# EAGLE board eib-128_panel (EAGLE 8.3.2), part 1 of 7
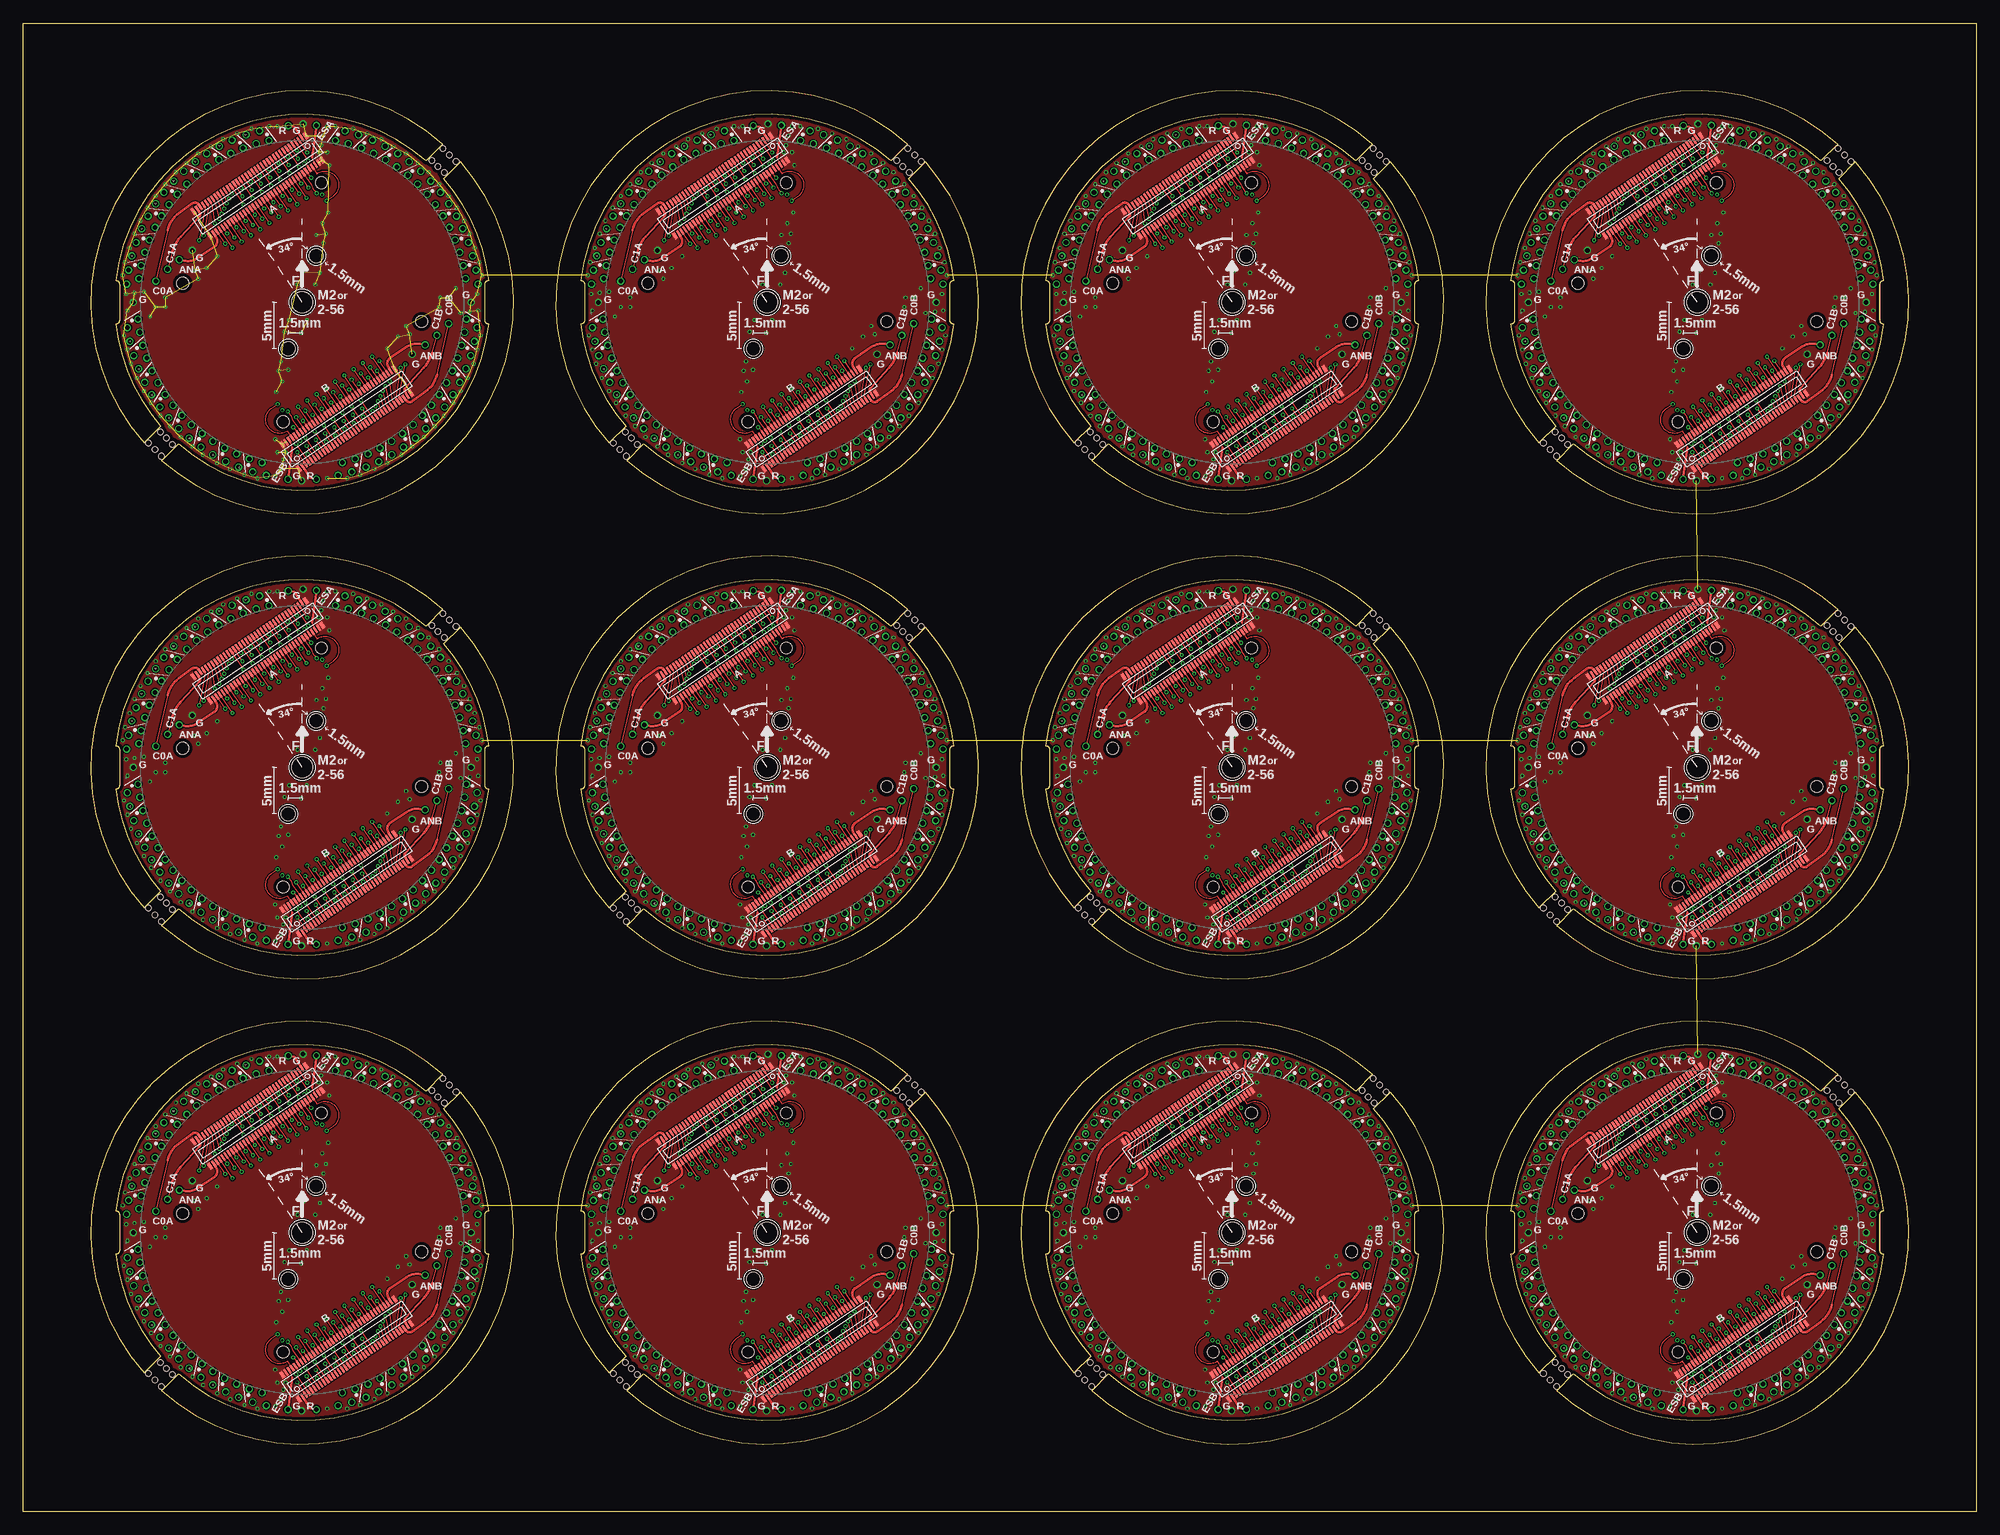
[diagram p0: board, top side]
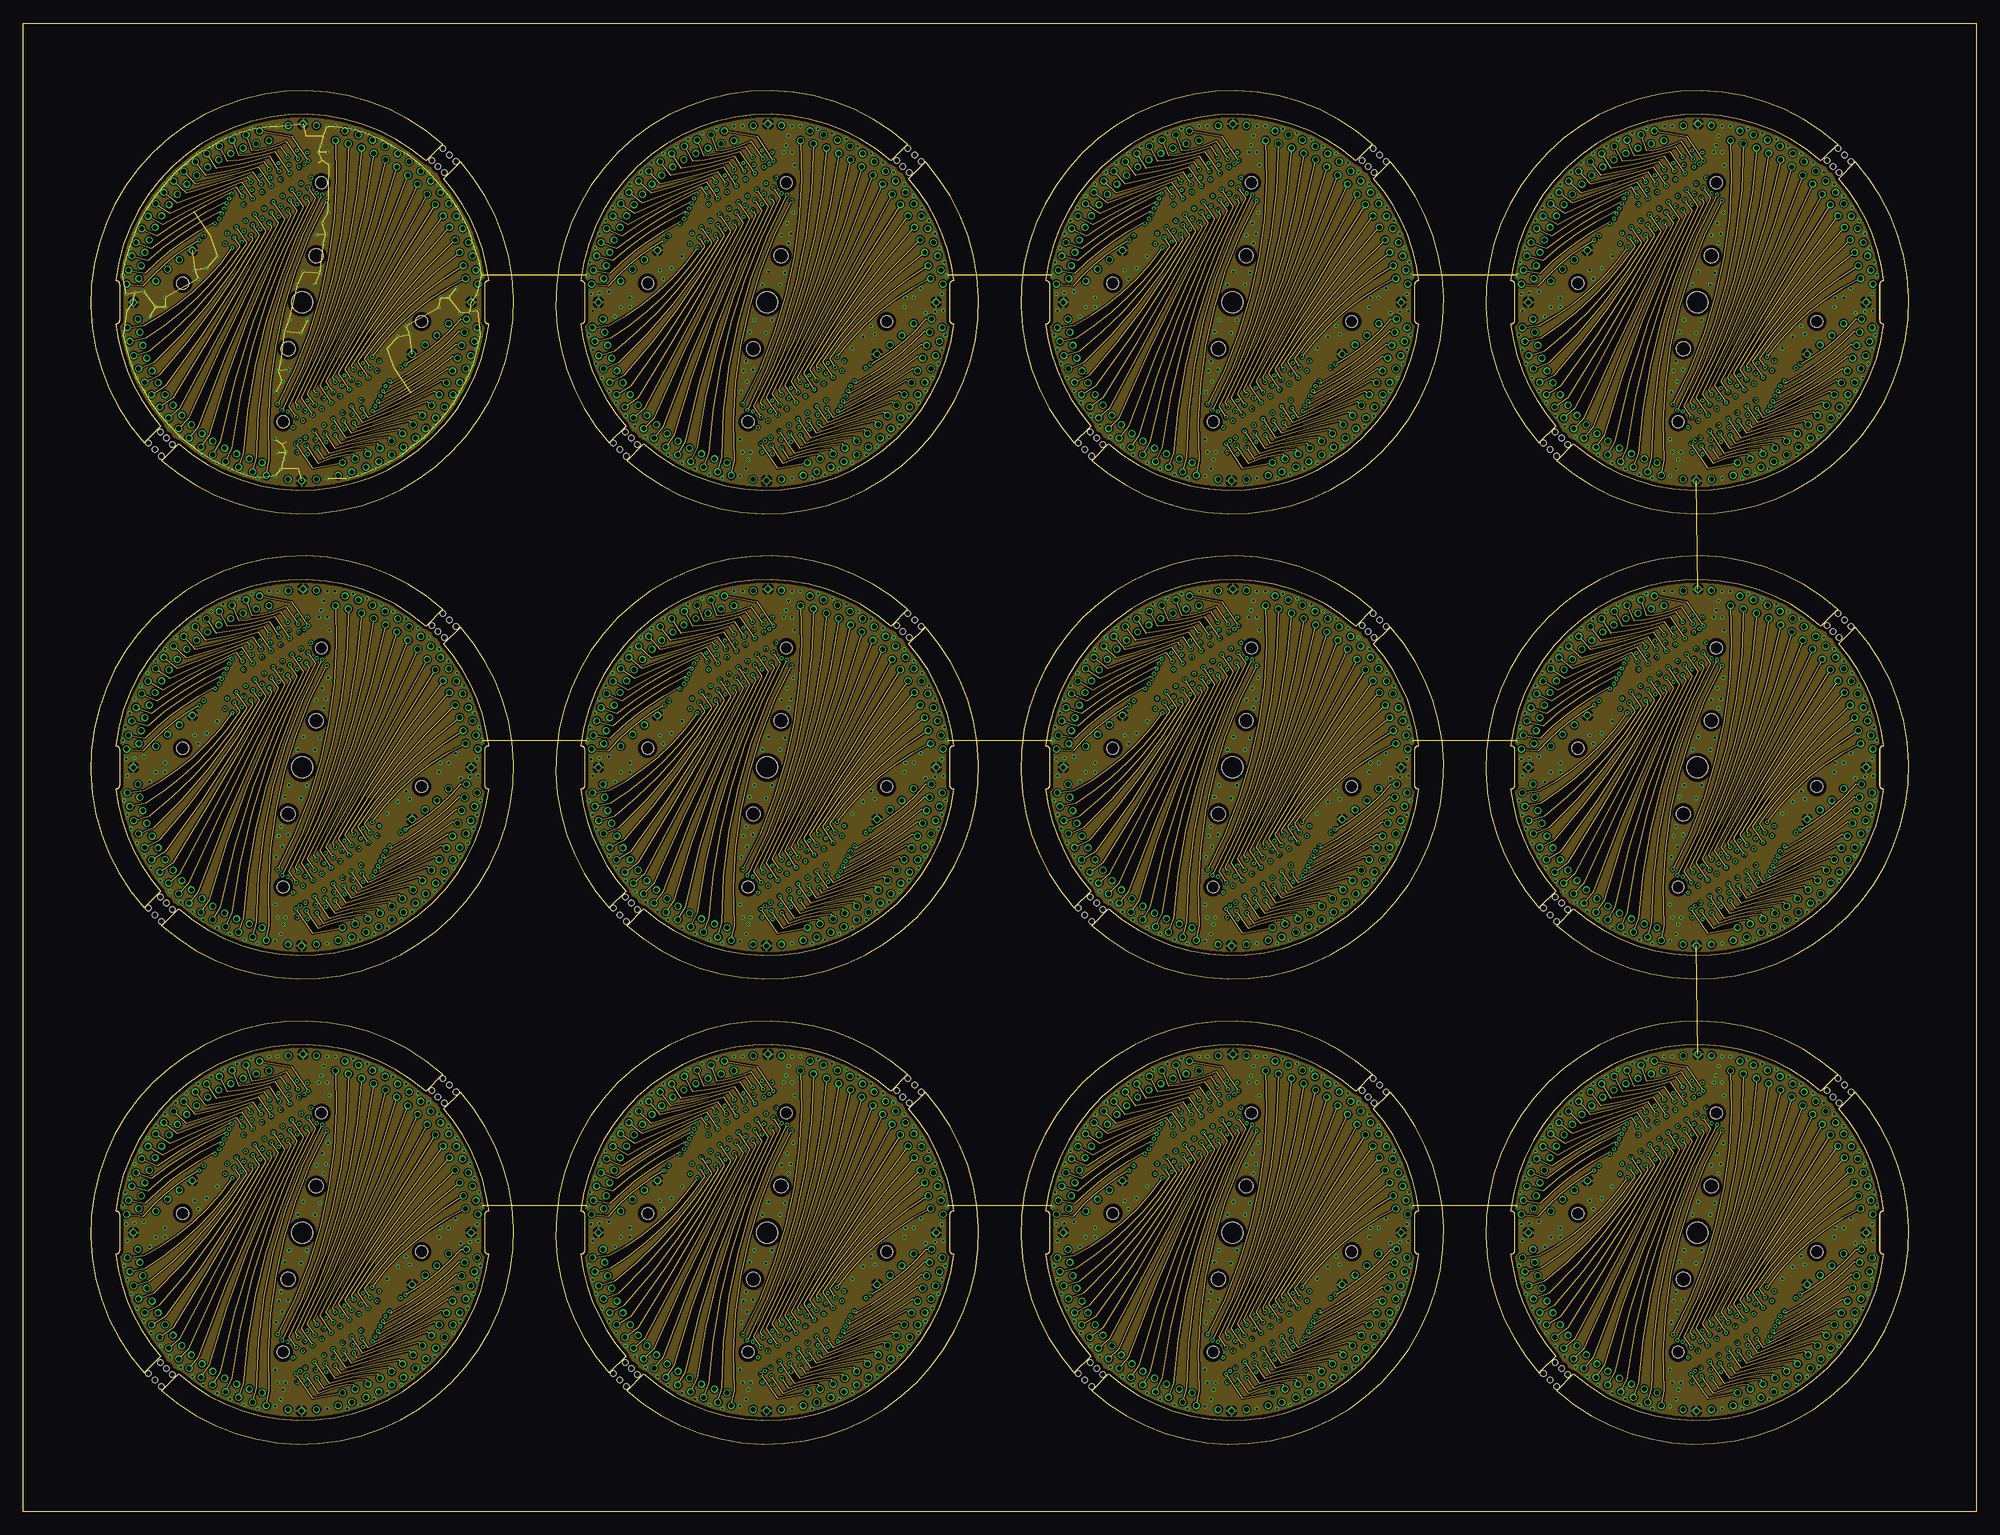
[diagram p1: board, inner layer Route2]
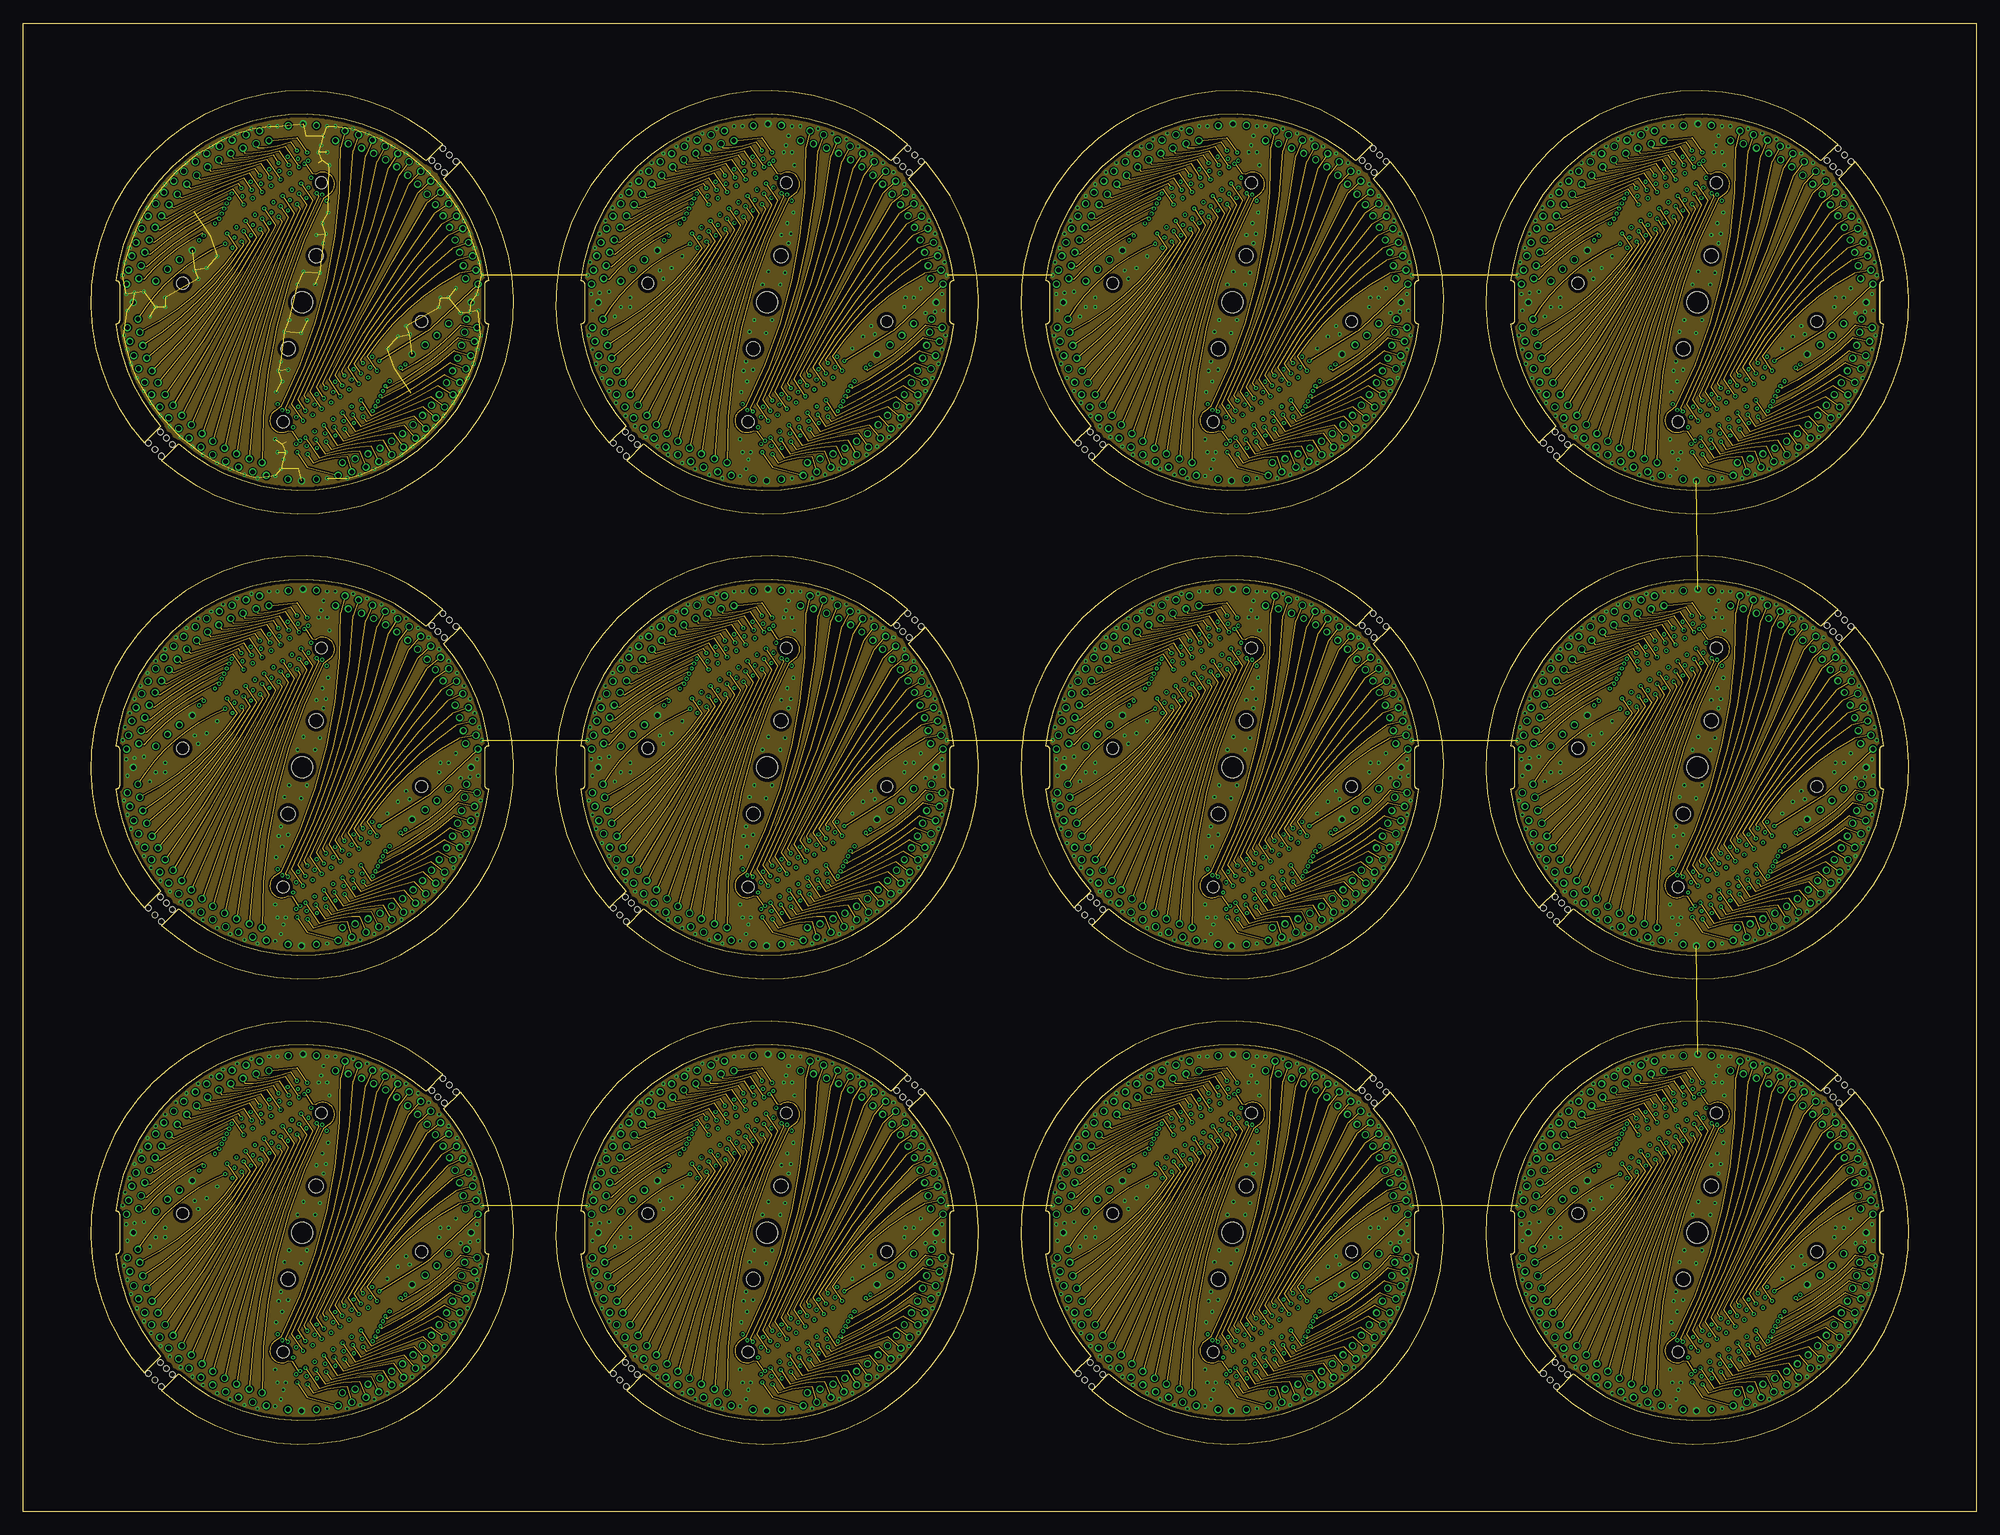
[diagram p2: board, inner layer Route15]
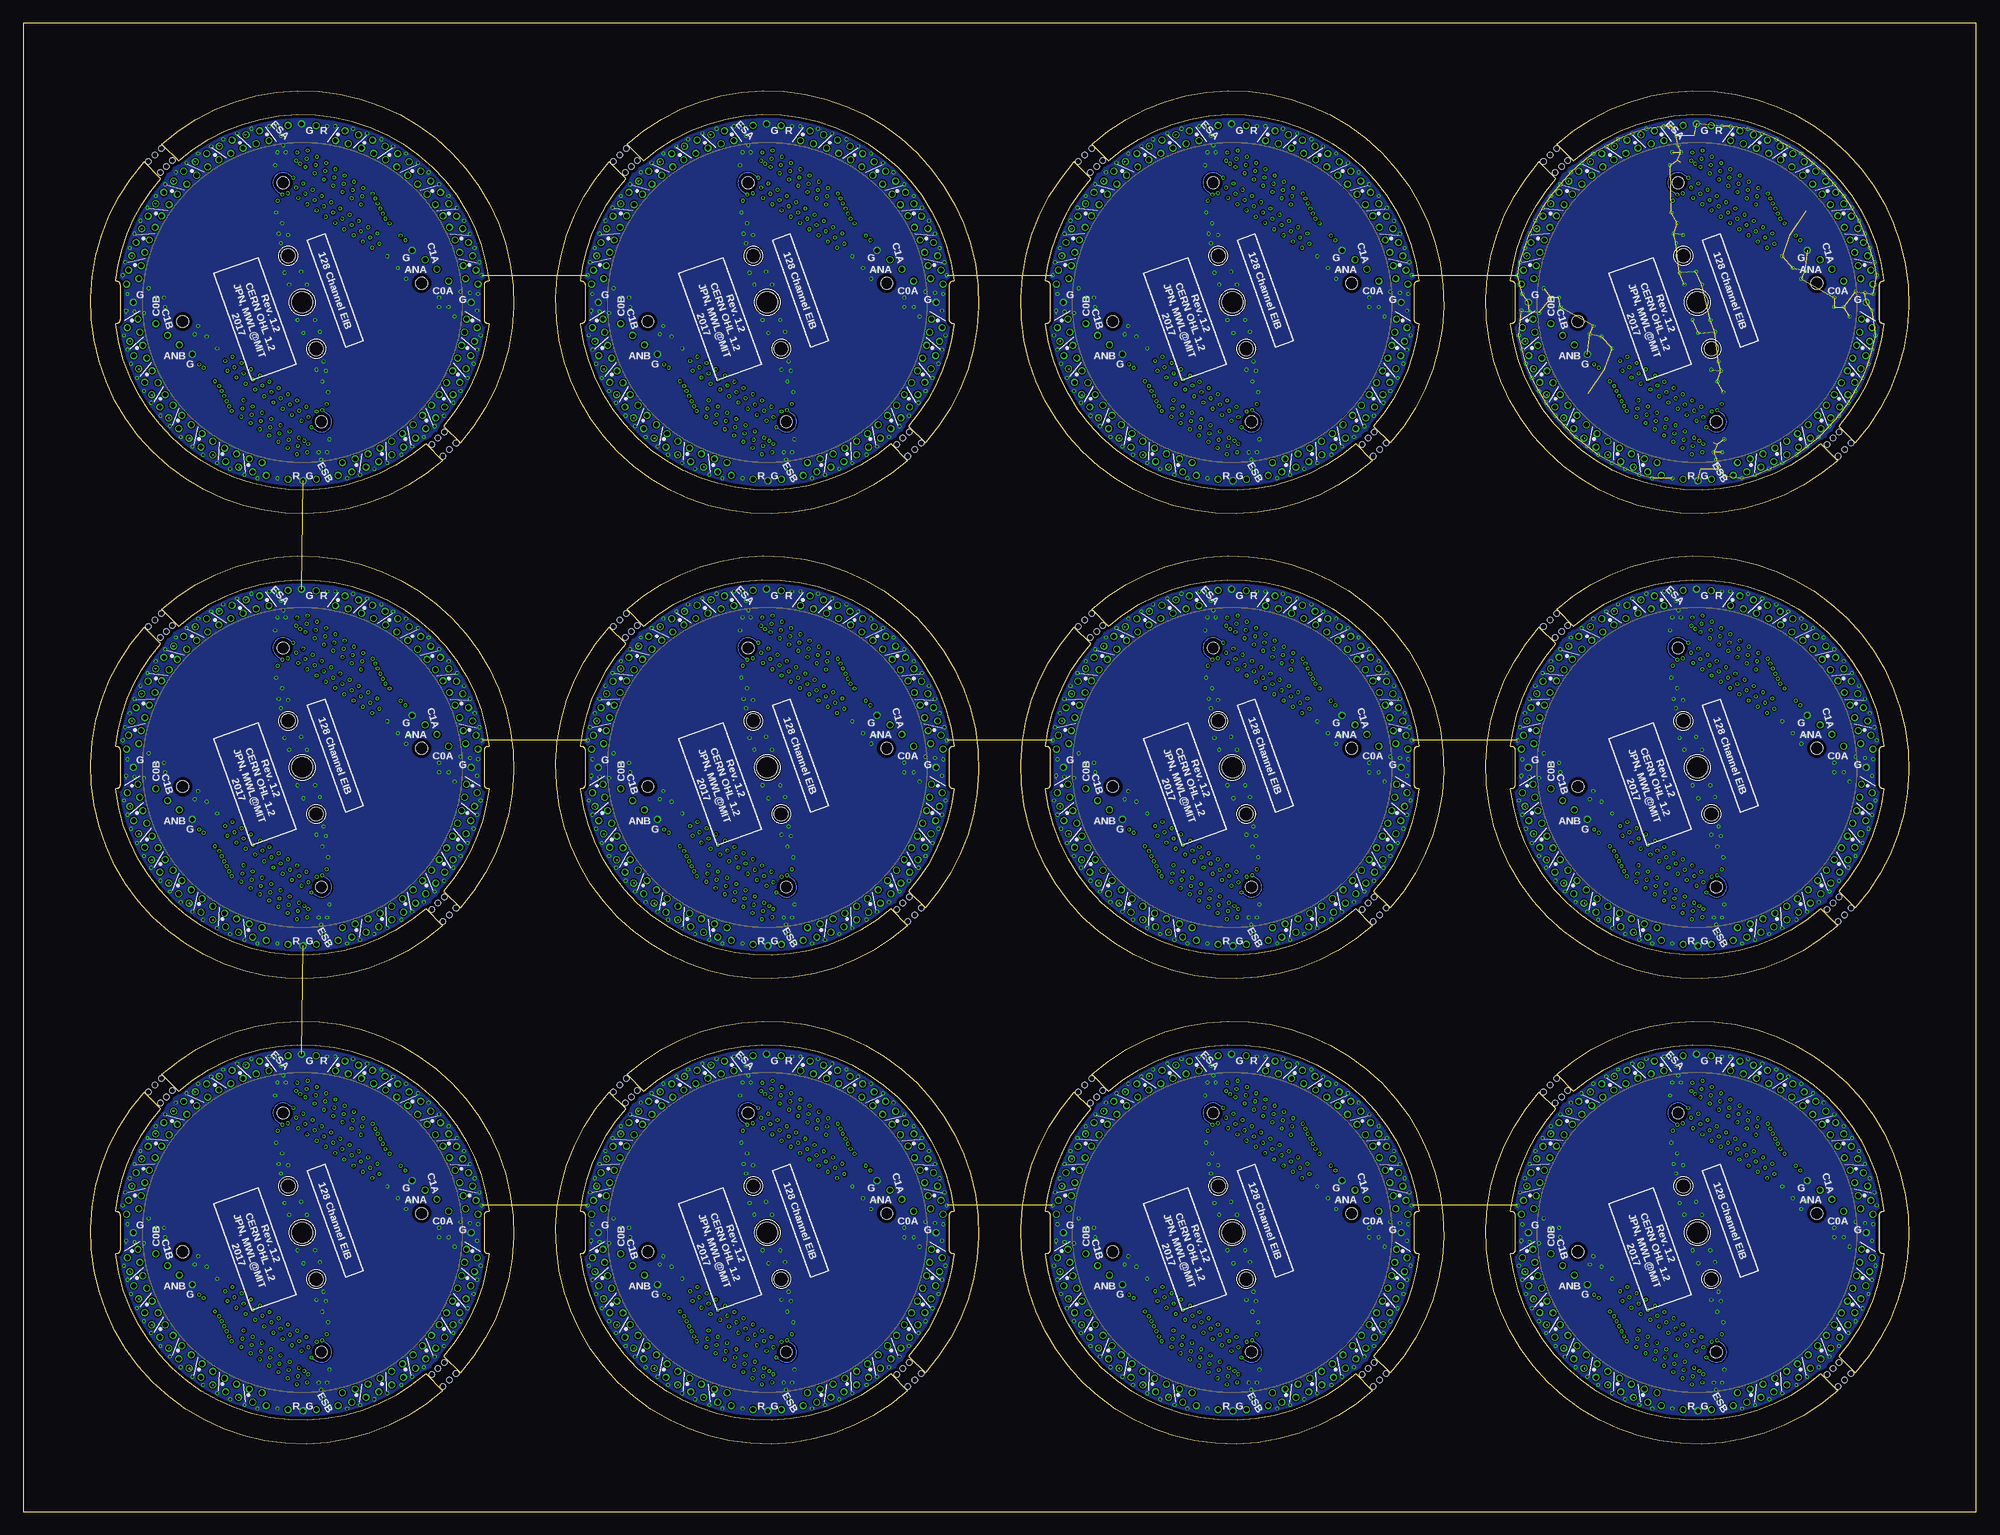
[diagram p3: board, bottom side, seen from below]

Size 210 x 160 mm. Coordinates in mm from the lower left corner, seen from the top.
Outline: 424 segments
Copper layers (1*2*15*16): Top 0.035559375mm / dielectric 0.17018125mm / Route2 0.01778125mm / dielectric 47mil / Route15 0.01778125mm / dielectric 0.17018125mm / Bottom 0.035559375mm
Design rules "sierra-circuits-advanced *": minimum track width 5mil, minimum drill 0.0078mm, track to track 5mil, track to pad 5mil, pad to pad 5mil, via to via 5mil, smd to smd 5mil, copper to edge 15mil, drill to drill 5mil, minimum pad ring 4mil, minimum via ring 4mil, stop-mask expansion 4mil, vias tented up to drill 100mil, thermal gap 10mil
Net classes: 1 thick: width 0.102 mm
Holes 1.27 mm at 32.06,42.85 42.85,27.94 27.94,17.15 17.15,32.06 82.06,42.85 92.85,27.94 77.94,17.15 67.15,32.06 132.06,42.85 142.85,27.94 127.94,17.15 117.15,32.06 182.06,42.85 192.85,27.94 177.94,17.15 167.15,32.06 32.06,92.85 42.85,77.94 27.94,67.15 17.15,82.06 82.06,92.85 92.85,77.94 77.94,67.15 67.15,82.06 132.06,92.85 142.85,77.94 127.94,67.15 117.15,82.06 182.06,92.85 192.85,77.94 177.94,67.15 167.15,82.06 32.06,142.85 42.85,127.94 27.94,117.15 17.15,132.06 82.06,142.85 92.85,127.94 77.94,117.15 67.15,132.06 132.06,142.85 142.85,127.94 127.94,117.15 117.15,132.06 182.06,142.85 192.85,127.94 177.94,117.15 167.15,132.06
Holes 0.6 mm at 45.13,46.55 45.84,45.84 46.55,45.13 43.95,45.26 44.59,44.59 45.26,43.95 14.87,13.45 14.16,14.16 13.45,14.87 16.05,14.74 15.41,15.41 14.74,16.05 95.13,46.55 95.84,45.84 96.55,45.13 93.95,45.26 94.59,44.59 95.26,43.95 64.87,13.45 64.16,14.16 63.45,14.87 66.05,14.74 65.41,15.41 64.74,16.05 145.13,46.55 145.84,45.84 146.55,45.13 143.95,45.26 144.59,44.59 145.26,43.95 114.87,13.45 114.16,14.16 113.45,14.87 116.05,14.74 115.41,15.41 114.74,16.05 195.13,46.55 195.84,45.84 196.55,45.13 193.95,45.26 194.59,44.59 195.26,43.95 164.87,13.45 164.16,14.16 163.45,14.87 166.05,14.74 165.41,15.41 164.74,16.05 45.13,96.55 45.84,95.84 46.55,95.13 43.95,95.26 44.59,94.59 45.26,93.95 14.87,63.45 14.16,64.16 13.45,64.87 16.05,64.74 15.41,65.41 14.74,66.05 95.13,96.55 95.84,95.84 96.55,95.13 93.95,95.26 94.59,94.59 95.26,93.95 64.87,63.45 64.16,64.16 63.45,64.87 66.05,64.74 65.41,65.41 64.74,66.05 145.13,96.55 145.84,95.84 146.55,95.13 143.95,95.26 144.59,94.59 145.26,93.95 114.87,63.45 114.16,64.16 113.45,64.87 116.05,64.74 115.41,65.41 114.74,66.05 195.13,96.55 195.84,95.84 196.55,95.13 193.95,95.26 194.59,94.59 195.26,93.95 164.87,63.45 164.16,64.16 163.45,64.87 166.05,64.74 165.41,65.41 164.74,66.05 45.13,146.55 45.84,145.84 46.55,145.13 43.95,145.26 44.59,144.59 45.26,143.95 14.87,113.45 14.16,114.16 13.45,114.87 16.05,114.74 15.41,115.41 14.74,116.05 95.13,146.55 95.84,145.84 96.55,145.13 93.95,145.26 94.59,144.59 95.26,143.95 64.87,113.45 64.16,114.16 63.45,114.87 66.05,114.74 65.41,115.41 64.74,116.05 145.13,146.55 145.84,145.84 146.55,145.13 143.95,145.26 144.59,144.59 145.26,143.95 114.87,113.45 114.16,114.16 113.45,114.87 116.05,114.74 115.41,115.41 114.74,116.05 195.13,146.55 195.84,145.84 196.55,145.13 193.95,145.26 194.59,144.59 195.26,143.95 164.87,113.45 164.16,114.16 163.45,114.87 166.05,114.74 165.41,115.41 164.74,116.05

## Footprints (pad centres in the part's own frame; a part is rotated, then mirrored left to right if it is on the bottom)
DF40-70HEAD = smd 0.23 x 0.75: 1 -6.8,-1.585; 2 -6.4,-1.585; 3 -6,-1.585; 4 -5.6,-1.585; 5 -5.2,-1.585; 6 -4.8,-1.585; 7 -4.4,-1.585; 8 -4,-1.585; 9 -3.6,-1.585; 10 -3.2,-1.585; 11 -2.8,-1.585; 12 -2.4,-1.585; 13 -2,-1.585; 14 -1.6,-1.585; 15 -1.2,-1.585; 16 -0.8,-1.585; 17 -0.4,-1.585; 18 0,-1.585; 19 0.4,-1.585; 20 0.8,-1.585; 21 1.2,-1.585; 22 1.6,-1.585; 23 2,-1.585; 24 2.4,-1.585; 25 2.8,-1.585; 26 3.2,-1.585; 27 3.6,-1.585; 28 4,-1.585; 29 4.4,-1.585; 30 4.8,-1.585; 31 5.2,-1.585; 32 5.6,-1.585; 33 6,-1.585; 34 6.4,-1.585; 35 6.8,-1.585; 36 6.8,1.585; 37 6.4,1.585; 38 6,1.585; 39 5.6,1.585; 40 5.2,1.585; 41 4.8,1.585; 42 4.4,1.585; 43 4,1.585; 44 3.6,1.585; 45 3.2,1.585; 46 2.8,1.585; 47 2.4,1.585; 48 2,1.585; 49 1.6,1.585; 50 1.2,1.585; 51 0.8,1.585; 52 0.4,1.585; 53 0,1.585; 54 -0.4,1.585; 55 -0.8,1.585; 56 -1.2,1.585; 57 -1.6,1.585; 58 -2,1.585; 59 -2.4,1.585; 60 -2.8,1.585; 61 -3.2,1.585; 62 -3.6,1.585; 63 -4,1.585; 64 -4.4,1.585; 65 -4.8,1.585; 66 -5.2,1.585; 67 -5.6,1.585; 68 -6,1.585; 69 -6.4,1.585; 70 -6.8,1.585 | smd 0.35 x 0.75: M1 -7.275,-1.585; M2 7.275,-1.585; M3 7.275,1.585; M4 -7.275,1.585
GOLDPIN_0.5ID_0.7OD = drill 0.5 pad 0.7: P$1 0,0
TETRODE_128_0.5ID_0.7OD = drill 0.5 pad 0.703: 0 0.724,17.743; 1 1.562,18.934; 2 2.14,17.628; 3 3.058,18.748
EIB_MOUNT_A = hole 2.261: 0,0 | hole 1.5: 1.5,5; -1.5,-5

## Placement (x,y rotation side)
A  DF40HEAD  [DF40-70HEAD]  25.23,42.53 214 top
A1  DF40HEAD  [DF40-70HEAD]  75.23,42.53 214 top
A2  DF40HEAD  [DF40-70HEAD]  125.23,42.53 214 top
A3  DF40HEAD  [DF40-70HEAD]  175.23,42.53 214 top
A4  DF40HEAD  [DF40-70HEAD]  25.23,92.53 214 top
A5  DF40HEAD  [DF40-70HEAD]  75.23,92.53 214 top
A6  DF40HEAD  [DF40-70HEAD]  125.23,92.53 214 top
A7  DF40HEAD  [DF40-70HEAD]  175.23,92.53 214 top
A8  DF40HEAD  [DF40-70HEAD]  25.23,142.53 214 top
A9  DF40HEAD  [DF40-70HEAD]  75.23,142.53 214 top
A10  DF40HEAD  [DF40-70HEAD]  125.23,142.53 214 top
A11  DF40HEAD  [DF40-70HEAD]  175.23,142.53 214 top
AN_A  LRG_GP  [GOLDPIN_0.5ID_0.7OD]  16.79,34.57 0 top
AN_A1  LRG_GP  [GOLDPIN_0.5ID_0.7OD]  66.79,34.57 0 top
AN_A2  LRG_GP  [GOLDPIN_0.5ID_0.7OD]  116.79,34.57 0 top
AN_A3  LRG_GP  [GOLDPIN_0.5ID_0.7OD]  166.79,34.57 0 top
AN_A4  LRG_GP  [GOLDPIN_0.5ID_0.7OD]  16.79,84.57 0 top
AN_A5  LRG_GP  [GOLDPIN_0.5ID_0.7OD]  66.79,84.57 0 top
AN_A6  LRG_GP  [GOLDPIN_0.5ID_0.7OD]  116.79,84.57 0 top
AN_A7  LRG_GP  [GOLDPIN_0.5ID_0.7OD]  166.79,84.57 0 top
AN_A8  LRG_GP  [GOLDPIN_0.5ID_0.7OD]  16.79,134.57 0 top
AN_A9  LRG_GP  [GOLDPIN_0.5ID_0.7OD]  66.79,134.57 0 top
AN_A10  LRG_GP  [GOLDPIN_0.5ID_0.7OD]  116.79,134.57 0 top
AN_A11  LRG_GP  [GOLDPIN_0.5ID_0.7OD]  166.79,134.57 0 top
AN_B  LRG_GP  [GOLDPIN_0.5ID_0.7OD]  43.21,25.43 0 top
AN_B1  LRG_GP  [GOLDPIN_0.5ID_0.7OD]  93.21,25.43 0 top
AN_B2  LRG_GP  [GOLDPIN_0.5ID_0.7OD]  143.21,25.43 0 top
AN_B3  LRG_GP  [GOLDPIN_0.5ID_0.7OD]  193.21,25.43 0 top
AN_B4  LRG_GP  [GOLDPIN_0.5ID_0.7OD]  43.21,75.43 0 top
AN_B5  LRG_GP  [GOLDPIN_0.5ID_0.7OD]  93.21,75.43 0 top
AN_B6  LRG_GP  [GOLDPIN_0.5ID_0.7OD]  143.21,75.43 0 top
AN_B7  LRG_GP  [GOLDPIN_0.5ID_0.7OD]  193.21,75.43 0 top
AN_B8  LRG_GP  [GOLDPIN_0.5ID_0.7OD]  43.21,125.43 0 top
AN_B9  LRG_GP  [GOLDPIN_0.5ID_0.7OD]  93.21,125.43 0 top
AN_B10  LRG_GP  [GOLDPIN_0.5ID_0.7OD]  143.21,125.43 0 top
AN_B11  LRG_GP  [GOLDPIN_0.5ID_0.7OD]  193.21,125.43 0 top
B  DF40HEAD  [DF40-70HEAD]  34.77,17.47 34 top
B1  DF40HEAD  [DF40-70HEAD]  84.77,17.47 34 top
B2  DF40HEAD  [DF40-70HEAD]  134.77,17.47 34 top
B3  DF40HEAD  [DF40-70HEAD]  184.77,17.47 34 top
B4  DF40HEAD  [DF40-70HEAD]  34.77,67.47 34 top
B5  DF40HEAD  [DF40-70HEAD]  84.77,67.47 34 top
B6  DF40HEAD  [DF40-70HEAD]  134.77,67.47 34 top
B7  DF40HEAD  [DF40-70HEAD]  184.77,67.47 34 top
B8  DF40HEAD  [DF40-70HEAD]  34.77,117.47 34 top
B9  DF40HEAD  [DF40-70HEAD]  84.77,117.47 34 top
B10  DF40HEAD  [DF40-70HEAD]  134.77,117.47 34 top
B11  DF40HEAD  [DF40-70HEAD]  184.77,117.47 34 top
CAT0_A  LRG_GP  [GOLDPIN_0.5ID_0.7OD]  14.25,32.29 0 top
CAT0_A1  LRG_GP  [GOLDPIN_0.5ID_0.7OD]  64.25,32.29 0 top
CAT0_A2  LRG_GP  [GOLDPIN_0.5ID_0.7OD]  114.25,32.29 0 top
CAT0_A3  LRG_GP  [GOLDPIN_0.5ID_0.7OD]  164.25,32.29 0 top
CAT0_A4  LRG_GP  [GOLDPIN_0.5ID_0.7OD]  14.25,82.29 0 top
CAT0_A5  LRG_GP  [GOLDPIN_0.5ID_0.7OD]  64.25,82.29 0 top
CAT0_A6  LRG_GP  [GOLDPIN_0.5ID_0.7OD]  114.25,82.29 0 top
CAT0_A7  LRG_GP  [GOLDPIN_0.5ID_0.7OD]  164.25,82.29 0 top
CAT0_A8  LRG_GP  [GOLDPIN_0.5ID_0.7OD]  14.25,132.29 0 top
CAT0_A9  LRG_GP  [GOLDPIN_0.5ID_0.7OD]  64.25,132.29 0 top
CAT0_A10  LRG_GP  [GOLDPIN_0.5ID_0.7OD]  114.25,132.29 0 top
CAT0_A11  LRG_GP  [GOLDPIN_0.5ID_0.7OD]  164.25,132.29 0 top
CAT0_B  LRG_GP  [GOLDPIN_0.5ID_0.7OD]  45.75,27.71 0 top
CAT0_B1  LRG_GP  [GOLDPIN_0.5ID_0.7OD]  95.75,27.71 0 top
CAT0_B2  LRG_GP  [GOLDPIN_0.5ID_0.7OD]  145.75,27.71 0 top
CAT0_B3  LRG_GP  [GOLDPIN_0.5ID_0.7OD]  195.75,27.71 0 top
CAT0_B4  LRG_GP  [GOLDPIN_0.5ID_0.7OD]  45.75,77.71 0 top
CAT0_B5  LRG_GP  [GOLDPIN_0.5ID_0.7OD]  95.75,77.71 0 top
CAT0_B6  LRG_GP  [GOLDPIN_0.5ID_0.7OD]  145.75,77.71 0 top
CAT0_B7  LRG_GP  [GOLDPIN_0.5ID_0.7OD]  195.75,77.71 0 top
CAT0_B8  LRG_GP  [GOLDPIN_0.5ID_0.7OD]  45.75,127.71 0 top
CAT0_B9  LRG_GP  [GOLDPIN_0.5ID_0.7OD]  95.75,127.71 0 top
CAT0_B10  LRG_GP  [GOLDPIN_0.5ID_0.7OD]  145.75,127.71 0 top
CAT0_B11  LRG_GP  [GOLDPIN_0.5ID_0.7OD]  195.75,127.71 0 top
CAT1_A  LRG_GP  [GOLDPIN_0.5ID_0.7OD]  15.52,33.56 0 top
CAT1_A1  LRG_GP  [GOLDPIN_0.5ID_0.7OD]  65.52,33.56 0 top
CAT1_A2  LRG_GP  [GOLDPIN_0.5ID_0.7OD]  115.52,33.56 0 top
CAT1_A3  LRG_GP  [GOLDPIN_0.5ID_0.7OD]  165.52,33.56 0 top
CAT1_A4  LRG_GP  [GOLDPIN_0.5ID_0.7OD]  15.52,83.56 0 top
CAT1_A5  LRG_GP  [GOLDPIN_0.5ID_0.7OD]  65.52,83.56 0 top
CAT1_A6  LRG_GP  [GOLDPIN_0.5ID_0.7OD]  115.52,83.56 0 top
CAT1_A7  LRG_GP  [GOLDPIN_0.5ID_0.7OD]  165.52,83.56 0 top
CAT1_A8  LRG_GP  [GOLDPIN_0.5ID_0.7OD]  15.52,133.56 0 top
CAT1_A9  LRG_GP  [GOLDPIN_0.5ID_0.7OD]  65.52,133.56 0 top
CAT1_A10  LRG_GP  [GOLDPIN_0.5ID_0.7OD]  115.52,133.56 0 top
CAT1_A11  LRG_GP  [GOLDPIN_0.5ID_0.7OD]  165.52,133.56 0 top
CAT1_B  LRG_GP  [GOLDPIN_0.5ID_0.7OD]  44.48,26.44 0 top
CAT1_B1  LRG_GP  [GOLDPIN_0.5ID_0.7OD]  94.48,26.44 0 top
CAT1_B2  LRG_GP  [GOLDPIN_0.5ID_0.7OD]  144.48,26.44 0 top
CAT1_B3  LRG_GP  [GOLDPIN_0.5ID_0.7OD]  194.48,26.44 0 top
CAT1_B4  LRG_GP  [GOLDPIN_0.5ID_0.7OD]  44.48,76.44 0 top
CAT1_B5  LRG_GP  [GOLDPIN_0.5ID_0.7OD]  94.48,76.44 0 top
CAT1_B6  LRG_GP  [GOLDPIN_0.5ID_0.7OD]  144.48,76.44 0 top
CAT1_B7  LRG_GP  [GOLDPIN_0.5ID_0.7OD]  194.48,76.44 0 top
CAT1_B8  LRG_GP  [GOLDPIN_0.5ID_0.7OD]  44.48,126.44 0 top
CAT1_B9  LRG_GP  [GOLDPIN_0.5ID_0.7OD]  94.48,126.44 0 top
CAT1_B10  LRG_GP  [GOLDPIN_0.5ID_0.7OD]  144.48,126.44 0 top
CAT1_B11  LRG_GP  [GOLDPIN_0.5ID_0.7OD]  194.48,126.44 0 top
ESTIM_A  LRG_GP  [GOLDPIN_0.5ID_0.7OD]  31.52,49.02 0 top
ESTIM_A1  LRG_GP  [GOLDPIN_0.5ID_0.7OD]  81.52,49.02 0 top
ESTIM_A2  LRG_GP  [GOLDPIN_0.5ID_0.7OD]  131.52,49.02 0 top
ESTIM_A3  LRG_GP  [GOLDPIN_0.5ID_0.7OD]  181.52,49.02 0 top
ESTIM_A4  LRG_GP  [GOLDPIN_0.5ID_0.7OD]  31.52,99.02 0 top
ESTIM_A5  LRG_GP  [GOLDPIN_0.5ID_0.7OD]  81.52,99.02 0 top
ESTIM_A6  LRG_GP  [GOLDPIN_0.5ID_0.7OD]  131.52,99.02 0 top
ESTIM_A7  LRG_GP  [GOLDPIN_0.5ID_0.7OD]  181.52,99.02 0 top
ESTIM_A8  LRG_GP  [GOLDPIN_0.5ID_0.7OD]  31.52,149.02 0 top
ESTIM_A9  LRG_GP  [GOLDPIN_0.5ID_0.7OD]  81.52,149.02 0 top
ESTIM_A10  LRG_GP  [GOLDPIN_0.5ID_0.7OD]  131.52,149.02 0 top
ESTIM_A11  LRG_GP  [GOLDPIN_0.5ID_0.7OD]  181.52,149.02 0 top
ESTIM_B  LRG_GP  [GOLDPIN_0.5ID_0.7OD]  28.48,10.98 0 top
ESTIM_B1  LRG_GP  [GOLDPIN_0.5ID_0.7OD]  78.48,10.98 0 top
ESTIM_B2  LRG_GP  [GOLDPIN_0.5ID_0.7OD]  128.48,10.98 0 top
ESTIM_B3  LRG_GP  [GOLDPIN_0.5ID_0.7OD]  178.48,10.98 0 top
ESTIM_B4  LRG_GP  [GOLDPIN_0.5ID_0.7OD]  28.48,60.98 0 top
ESTIM_B5  LRG_GP  [GOLDPIN_0.5ID_0.7OD]  78.48,60.98 0 top
ESTIM_B6  LRG_GP  [GOLDPIN_0.5ID_0.7OD]  128.48,60.98 0 top
ESTIM_B7  LRG_GP  [GOLDPIN_0.5ID_0.7OD]  178.48,60.98 0 top
ESTIM_B8  LRG_GP  [GOLDPIN_0.5ID_0.7OD]  28.48,110.98 0 top
ESTIM_B9  LRG_GP  [GOLDPIN_0.5ID_0.7OD]  78.48,110.98 0 top
ESTIM_B10  LRG_GP  [GOLDPIN_0.5ID_0.7OD]  128.48,110.98 0 top
ESTIM_B11  LRG_GP  [GOLDPIN_0.5ID_0.7OD]  178.48,110.98 0 top
GND0  LRG_GP  [GOLDPIN_0.5ID_0.7OD]  29.92,10.82 0 top
GND1  LRG_GP  [GOLDPIN_0.5ID_0.7OD]  11.84,30 0 top
GND2  LRG_GP  [GOLDPIN_0.5ID_0.7OD]  18.19,35.59 0 top
GND3  LRG_GP  [GOLDPIN_0.5ID_0.7OD]  48.16,30 0 top
GND4  LRG_GP  [GOLDPIN_0.5ID_0.7OD]  79.92,10.82 0 top
GND5  LRG_GP  [GOLDPIN_0.5ID_0.7OD]  61.84,30 0 top
GND6  LRG_GP  [GOLDPIN_0.5ID_0.7OD]  68.19,35.59 0 top
GND7  LRG_GP  [GOLDPIN_0.5ID_0.7OD]  98.16,30 0 top
GND8  LRG_GP  [GOLDPIN_0.5ID_0.7OD]  129.92,10.82 0 top
GND9  LRG_GP  [GOLDPIN_0.5ID_0.7OD]  111.84,30 0 top
GND10  LRG_GP  [GOLDPIN_0.5ID_0.7OD]  118.19,35.59 0 top
GND11  LRG_GP  [GOLDPIN_0.5ID_0.7OD]  148.16,30 0 top
GND12  LRG_GP  [GOLDPIN_0.5ID_0.7OD]  179.92,10.82 0 top
GND13  LRG_GP  [GOLDPIN_0.5ID_0.7OD]  161.84,30 0 top
GND14  LRG_GP  [GOLDPIN_0.5ID_0.7OD]  168.19,35.59 0 top
GND15  LRG_GP  [GOLDPIN_0.5ID_0.7OD]  198.16,30 0 top
GND16  LRG_GP  [GOLDPIN_0.5ID_0.7OD]  29.92,60.82 0 top
GND17  LRG_GP  [GOLDPIN_0.5ID_0.7OD]  11.84,80 0 top
GND18  LRG_GP  [GOLDPIN_0.5ID_0.7OD]  18.19,85.59 0 top
GND19  LRG_GP  [GOLDPIN_0.5ID_0.7OD]  48.16,80 0 top
GND20  LRG_GP  [GOLDPIN_0.5ID_0.7OD]  79.92,60.82 0 top
GND21  LRG_GP  [GOLDPIN_0.5ID_0.7OD]  61.84,80 0 top
GND22  LRG_GP  [GOLDPIN_0.5ID_0.7OD]  68.19,85.59 0 top
GND23  LRG_GP  [GOLDPIN_0.5ID_0.7OD]  98.16,80 0 top
GND24  LRG_GP  [GOLDPIN_0.5ID_0.7OD]  129.92,60.82 0 top
GND25  LRG_GP  [GOLDPIN_0.5ID_0.7OD]  111.84,80 0 top
GND26  LRG_GP  [GOLDPIN_0.5ID_0.7OD]  118.19,85.59 0 top
GND27  LRG_GP  [GOLDPIN_0.5ID_0.7OD]  148.16,80 0 top
GND28  LRG_GP  [GOLDPIN_0.5ID_0.7OD]  179.92,60.82 0 top
GND29  LRG_GP  [GOLDPIN_0.5ID_0.7OD]  161.84,80 0 top
GND30  LRG_GP  [GOLDPIN_0.5ID_0.7OD]  168.19,85.59 0 top
GND31  LRG_GP  [GOLDPIN_0.5ID_0.7OD]  198.16,80 0 top
GND32  LRG_GP  [GOLDPIN_0.5ID_0.7OD]  29.92,110.82 0 top
GND33  LRG_GP  [GOLDPIN_0.5ID_0.7OD]  11.84,130 0 top
GND34  LRG_GP  [GOLDPIN_0.5ID_0.7OD]  18.19,135.59 0 top
GND35  LRG_GP  [GOLDPIN_0.5ID_0.7OD]  48.16,130 0 top
GND36  LRG_GP  [GOLDPIN_0.5ID_0.7OD]  79.92,110.82 0 top
GND37  LRG_GP  [GOLDPIN_0.5ID_0.7OD]  61.84,130 0 top
GND38  LRG_GP  [GOLDPIN_0.5ID_0.7OD]  68.19,135.59 0 top
GND39  LRG_GP  [GOLDPIN_0.5ID_0.7OD]  98.16,130 0 top
GND40  LRG_GP  [GOLDPIN_0.5ID_0.7OD]  129.92,110.82 0 top
GND41  LRG_GP  [GOLDPIN_0.5ID_0.7OD]  111.84,130 0 top
GND42  LRG_GP  [GOLDPIN_0.5ID_0.7OD]  118.19,135.59 0 top
GND43  LRG_GP  [GOLDPIN_0.5ID_0.7OD]  148.16,130 0 top
GND44  LRG_GP  [GOLDPIN_0.5ID_0.7OD]  179.92,110.82 0 top
GND45  LRG_GP  [GOLDPIN_0.5ID_0.7OD]  161.84,130 0 top
GND46  LRG_GP  [GOLDPIN_0.5ID_0.7OD]  168.19,135.59 0 top
GND47  LRG_GP  [GOLDPIN_0.5ID_0.7OD]  198.16,130 0 top
REF_A0  LRG_GP  [GOLDPIN_0.5ID_0.7OD]  28.5,49 0 top
REF_A1  LRG_GP  [GOLDPIN_0.5ID_0.7OD]  78.5,49 0 top
REF_A2  LRG_GP  [GOLDPIN_0.5ID_0.7OD]  128.5,49 0 top
REF_A3  LRG_GP  [GOLDPIN_0.5ID_0.7OD]  178.5,49 0 top
REF_A4  LRG_GP  [GOLDPIN_0.5ID_0.7OD]  28.5,99 0 top
REF_A5  LRG_GP  [GOLDPIN_0.5ID_0.7OD]  78.5,99 0 top
REF_A6  LRG_GP  [GOLDPIN_0.5ID_0.7OD]  128.5,99 0 top
REF_A7  LRG_GP  [GOLDPIN_0.5ID_0.7OD]  178.5,99 0 top
REF_A8  LRG_GP  [GOLDPIN_0.5ID_0.7OD]  28.5,149 0 top
REF_A9  LRG_GP  [GOLDPIN_0.5ID_0.7OD]  78.5,149 0 top
REF_A10  LRG_GP  [GOLDPIN_0.5ID_0.7OD]  128.5,149 0 top
REF_A11  LRG_GP  [GOLDPIN_0.5ID_0.7OD]  178.5,149 0 top
REF_B0  LRG_GP  [GOLDPIN_0.5ID_0.7OD]  31.52,10.98 34 top
REF_B1  LRG_GP  [GOLDPIN_0.5ID_0.7OD]  81.52,10.98 34 top
REF_B2  LRG_GP  [GOLDPIN_0.5ID_0.7OD]  131.52,10.98 34 top
REF_B3  LRG_GP  [GOLDPIN_0.5ID_0.7OD]  181.52,10.98 34 top
REF_B4  LRG_GP  [GOLDPIN_0.5ID_0.7OD]  31.52,60.98 34 top
REF_B5  LRG_GP  [GOLDPIN_0.5ID_0.7OD]  81.52,60.98 34 top
REF_B6  LRG_GP  [GOLDPIN_0.5ID_0.7OD]  131.52,60.98 34 top
REF_B7  LRG_GP  [GOLDPIN_0.5ID_0.7OD]  181.52,60.98 34 top
REF_B8  LRG_GP  [GOLDPIN_0.5ID_0.7OD]  31.52,110.98 34 top
REF_B9  LRG_GP  [GOLDPIN_0.5ID_0.7OD]  81.52,110.98 34 top
REF_B10  LRG_GP  [GOLDPIN_0.5ID_0.7OD]  131.52,110.98 34 top
REF_B11  LRG_GP  [GOLDPIN_0.5ID_0.7OD]  181.52,110.98 34 top
SHLD_A  LRG_GP  [GOLDPIN_0.5ID_0.7OD]  41.81,24.41 0 top
SHLD_A1  LRG_GP  [GOLDPIN_0.5ID_0.7OD]  91.81,24.41 0 top
SHLD_A2  LRG_GP  [GOLDPIN_0.5ID_0.7OD]  141.81,24.41 0 top
SHLD_A3  LRG_GP  [GOLDPIN_0.5ID_0.7OD]  191.81,24.41 0 top
SHLD_A4  LRG_GP  [GOLDPIN_0.5ID_0.7OD]  41.81,74.41 0 top
SHLD_A5  LRG_GP  [GOLDPIN_0.5ID_0.7OD]  91.81,74.41 0 top
SHLD_A6  LRG_GP  [GOLDPIN_0.5ID_0.7OD]  141.81,74.41 0 top
SHLD_A7  LRG_GP  [GOLDPIN_0.5ID_0.7OD]  191.81,74.41 0 top
SHLD_A8  LRG_GP  [GOLDPIN_0.5ID_0.7OD]  41.81,124.41 0 top
SHLD_A9  LRG_GP  [GOLDPIN_0.5ID_0.7OD]  91.81,124.41 0 top
SHLD_A10  LRG_GP  [GOLDPIN_0.5ID_0.7OD]  141.81,124.41 0 top
SHLD_A11  LRG_GP  [GOLDPIN_0.5ID_0.7OD]  191.81,124.41 0 top
SHLD_B  LRG_GP  [GOLDPIN_0.5ID_0.7OD]  30.08,49.18 0 top
SHLD_B1  LRG_GP  [GOLDPIN_0.5ID_0.7OD]  80.08,49.18 0 top
SHLD_B2  LRG_GP  [GOLDPIN_0.5ID_0.7OD]  130.08,49.18 0 top
SHLD_B3  LRG_GP  [GOLDPIN_0.5ID_0.7OD]  180.08,49.18 0 top
SHLD_B4  LRG_GP  [GOLDPIN_0.5ID_0.7OD]  30.08,99.18 0 top
SHLD_B5  LRG_GP  [GOLDPIN_0.5ID_0.7OD]  80.08,99.18 0 top
SHLD_B6  LRG_GP  [GOLDPIN_0.5ID_0.7OD]  130.08,99.18 0 top
SHLD_B7  LRG_GP  [GOLDPIN_0.5ID_0.7OD]  180.08,99.18 0 top
SHLD_B8  LRG_GP  [GOLDPIN_0.5ID_0.7OD]  30.08,149.18 0 top
SHLD_B9  LRG_GP  [GOLDPIN_0.5ID_0.7OD]  80.08,149.18 0 top
SHLD_B10  LRG_GP  [GOLDPIN_0.5ID_0.7OD]  130.08,149.18 0 top
SHLD_B11  LRG_GP  [GOLDPIN_0.5ID_0.7OD]  180.08,149.18 0 top
TET0  0  [TETRODE_128_0.5ID_0.7OD]  30,30 350.7 bottom
TET1  1  [TETRODE_128_0.5ID_0.7OD]  30,30 341.3 bottom
TET2  2  [TETRODE_128_0.5ID_0.7OD]  30,30 332 bottom
TET3  3  [TETRODE_128_0.5ID_0.7OD]  30,30 322.6 bottom
TET4  4  [TETRODE_128_0.5ID_0.7OD]  30,30 313.2 bottom
TET5  5  [TETRODE_128_0.5ID_0.7OD]  30,30 303.9 bottom
TET6  6  [TETRODE_128_0.5ID_0.7OD]  30,30 294.5 bottom
TET7  7  [TETRODE_128_0.5ID_0.7OD]  30,30 285.2 bottom
TET8  8  [TETRODE_128_0.5ID_0.7OD]  30,30 266.5 bottom
TET9  9  [TETRODE_128_0.5ID_0.7OD]  30,30 257.2 bottom
TET10  10  [TETRODE_128_0.5ID_0.7OD]  30,30 247.8 bottom
TET11  11  [TETRODE_128_0.5ID_0.7OD]  30,30 238.4 bottom
TET12  12  [TETRODE_128_0.5ID_0.7OD]  30,30 229.1 bottom
TET13  13  [TETRODE_128_0.5ID_0.7OD]  30,30 219.7 bottom
TET14  14  [TETRODE_128_0.5ID_0.7OD]  30,30 210.4 bottom
TET15  15  [TETRODE_128_0.5ID_0.7OD]  30,30 201 bottom
TET16  16  [TETRODE_128_0.5ID_0.7OD]  30,30 201 top
TET17  17  [TETRODE_128_0.5ID_0.7OD]  30,30 210.4 top
TET18  18  [TETRODE_128_0.5ID_0.7OD]  30,30 219.7 top
TET19  19  [TETRODE_128_0.5ID_0.7OD]  30,30 229.1 top
TET20  20  [TETRODE_128_0.5ID_0.7OD]  30,30 238.4 top
TET21  21  [TETRODE_128_0.5ID_0.7OD]  30,30 247.8 top
TET22  22  [TETRODE_128_0.5ID_0.7OD]  30,30 257.2 top
TET23  23  [TETRODE_128_0.5ID_0.7OD]  30,30 266.5 top
TET24  24  [TETRODE_128_0.5ID_0.7OD]  30,30 285.2 top
TET25  25  [TETRODE_128_0.5ID_0.7OD]  30,30 294.5 top
TET26  26  [TETRODE_128_0.5ID_0.7OD]  30,30 303.9 top
TET27  27  [TETRODE_128_0.5ID_0.7OD]  30,30 313.2 top
TET28  28  [TETRODE_128_0.5ID_0.7OD]  30,30 322.6 top
TET29  29  [TETRODE_128_0.5ID_0.7OD]  30,30 332 top
TET30  30  [TETRODE_128_0.5ID_0.7OD]  30,30 341.3 top
TET31  31  [TETRODE_128_0.5ID_0.7OD]  30,30 350.7 top
TET32  0  [TETRODE_128_0.5ID_0.7OD]  80,30 350.7 bottom
TET33  1  [TETRODE_128_0.5ID_0.7OD]  80,30 341.3 bottom
TET34  2  [TETRODE_128_0.5ID_0.7OD]  80,30 332 bottom
TET35  3  [TETRODE_128_0.5ID_0.7OD]  80,30 322.6 bottom
TET36  4  [TETRODE_128_0.5ID_0.7OD]  80,30 313.2 bottom
TET37  5  [TETRODE_128_0.5ID_0.7OD]  80,30 303.9 bottom
TET38  6  [TETRODE_128_0.5ID_0.7OD]  80,30 294.5 bottom
TET39  7  [TETRODE_128_0.5ID_0.7OD]  80,30 285.2 bottom
TET40  8  [TETRODE_128_0.5ID_0.7OD]  80,30 266.5 bottom
TET41  9  [TETRODE_128_0.5ID_0.7OD]  80,30 257.2 bottom
TET42  10  [TETRODE_128_0.5ID_0.7OD]  80,30 247.8 bottom
TET43  11  [TETRODE_128_0.5ID_0.7OD]  80,30 238.4 bottom
TET44  12  [TETRODE_128_0.5ID_0.7OD]  80,30 229.1 bottom
TET45  13  [TETRODE_128_0.5ID_0.7OD]  80,30 219.7 bottom
TET46  14  [TETRODE_128_0.5ID_0.7OD]  80,30 210.4 bottom
TET47  15  [TETRODE_128_0.5ID_0.7OD]  80,30 201 bottom
TET48  16  [TETRODE_128_0.5ID_0.7OD]  80,30 201 top
TET49  17  [TETRODE_128_0.5ID_0.7OD]  80,30 210.4 top
TET50  18  [TETRODE_128_0.5ID_0.7OD]  80,30 219.7 top
TET51  19  [TETRODE_128_0.5ID_0.7OD]  80,30 229.1 top
TET52  20  [TETRODE_128_0.5ID_0.7OD]  80,30 238.4 top
TET53  21  [TETRODE_128_0.5ID_0.7OD]  80,30 247.8 top
TET54  22  [TETRODE_128_0.5ID_0.7OD]  80,30 257.2 top
TET55  23  [TETRODE_128_0.5ID_0.7OD]  80,30 266.5 top
TET56  24  [TETRODE_128_0.5ID_0.7OD]  80,30 285.2 top
TET57  25  [TETRODE_128_0.5ID_0.7OD]  80,30 294.5 top
TET58  26  [TETRODE_128_0.5ID_0.7OD]  80,30 303.9 top
TET59  27  [TETRODE_128_0.5ID_0.7OD]  80,30 313.2 top
TET60  28  [TETRODE_128_0.5ID_0.7OD]  80,30 322.6 top
TET61  29  [TETRODE_128_0.5ID_0.7OD]  80,30 332 top
TET62  30  [TETRODE_128_0.5ID_0.7OD]  80,30 341.3 top
TET63  31  [TETRODE_128_0.5ID_0.7OD]  80,30 350.7 top
TET64  0  [TETRODE_128_0.5ID_0.7OD]  130,30 350.7 bottom
TET65  1  [TETRODE_128_0.5ID_0.7OD]  130,30 341.3 bottom
TET66  2  [TETRODE_128_0.5ID_0.7OD]  130,30 332 bottom
TET67  3  [TETRODE_128_0.5ID_0.7OD]  130,30 322.6 bottom
TET68  4  [TETRODE_128_0.5ID_0.7OD]  130,30 313.2 bottom
TET69  5  [TETRODE_128_0.5ID_0.7OD]  130,30 303.9 bottom
TET70  6  [TETRODE_128_0.5ID_0.7OD]  130,30 294.5 bottom
TET71  7  [TETRODE_128_0.5ID_0.7OD]  130,30 285.2 bottom
TET72  8  [TETRODE_128_0.5ID_0.7OD]  130,30 266.5 bottom
TET73  9  [TETRODE_128_0.5ID_0.7OD]  130,30 257.2 bottom
TET74  10  [TETRODE_128_0.5ID_0.7OD]  130,30 247.8 bottom
TET75  11  [TETRODE_128_0.5ID_0.7OD]  130,30 238.4 bottom
TET76  12  [TETRODE_128_0.5ID_0.7OD]  130,30 229.1 bottom
TET77  13  [TETRODE_128_0.5ID_0.7OD]  130,30 219.7 bottom
TET78  14  [TETRODE_128_0.5ID_0.7OD]  130,30 210.4 bottom
TET79  15  [TETRODE_128_0.5ID_0.7OD]  130,30 201 bottom
TET80  16  [TETRODE_128_0.5ID_0.7OD]  130,30 201 top
TET81  17  [TETRODE_128_0.5ID_0.7OD]  130,30 210.4 top
TET82  18  [TETRODE_128_0.5ID_0.7OD]  130,30 219.7 top
TET83  19  [TETRODE_128_0.5ID_0.7OD]  130,30 229.1 top
TET84  20  [TETRODE_128_0.5ID_0.7OD]  130,30 238.4 top
TET85  21  [TETRODE_128_0.5ID_0.7OD]  130,30 247.8 top
TET86  22  [TETRODE_128_0.5ID_0.7OD]  130,30 257.2 top
TET87  23  [TETRODE_128_0.5ID_0.7OD]  130,30 266.5 top
TET88  24  [TETRODE_128_0.5ID_0.7OD]  130,30 285.2 top
TET89  25  [TETRODE_128_0.5ID_0.7OD]  130,30 294.5 top
TET90  26  [TETRODE_128_0.5ID_0.7OD]  130,30 303.9 top
TET91  27  [TETRODE_128_0.5ID_0.7OD]  130,30 313.2 top
TET92  28  [TETRODE_128_0.5ID_0.7OD]  130,30 322.6 top
TET93  29  [TETRODE_128_0.5ID_0.7OD]  130,30 332 top
TET94  30  [TETRODE_128_0.5ID_0.7OD]  130,30 341.3 top
TET95  31  [TETRODE_128_0.5ID_0.7OD]  130,30 350.7 top
TET96  0  [TETRODE_128_0.5ID_0.7OD]  180,30 350.7 bottom
TET97  1  [TETRODE_128_0.5ID_0.7OD]  180,30 341.3 bottom
TET98  2  [TETRODE_128_0.5ID_0.7OD]  180,30 332 bottom
TET99  3  [TETRODE_128_0.5ID_0.7OD]  180,30 322.6 bottom
TET100  4  [TETRODE_128_0.5ID_0.7OD]  180,30 313.2 bottom
TET101  5  [TETRODE_128_0.5ID_0.7OD]  180,30 303.9 bottom
TET102  6  [TETRODE_128_0.5ID_0.7OD]  180,30 294.5 bottom
TET103  7  [TETRODE_128_0.5ID_0.7OD]  180,30 285.2 bottom
TET104  8  [TETRODE_128_0.5ID_0.7OD]  180,30 266.5 bottom
TET105  9  [TETRODE_128_0.5ID_0.7OD]  180,30 257.2 bottom
TET106  10  [TETRODE_128_0.5ID_0.7OD]  180,30 247.8 bottom
TET107  11  [TETRODE_128_0.5ID_0.7OD]  180,30 238.4 bottom
TET108  12  [TETRODE_128_0.5ID_0.7OD]  180,30 229.1 bottom
TET109  13  [TETRODE_128_0.5ID_0.7OD]  180,30 219.7 bottom
TET110  14  [TETRODE_128_0.5ID_0.7OD]  180,30 210.4 bottom
TET111  15  [TETRODE_128_0.5ID_0.7OD]  180,30 201 bottom
TET112  16  [TETRODE_128_0.5ID_0.7OD]  180,30 201 top
TET113  17  [TETRODE_128_0.5ID_0.7OD]  180,30 210.4 top
TET114  18  [TETRODE_128_0.5ID_0.7OD]  180,30 219.7 top
TET115  19  [TETRODE_128_0.5ID_0.7OD]  180,30 229.1 top
TET116  20  [TETRODE_128_0.5ID_0.7OD]  180,30 238.4 top
TET117  21  [TETRODE_128_0.5ID_0.7OD]  180,30 247.8 top
TET118  22  [TETRODE_128_0.5ID_0.7OD]  180,30 257.2 top
TET119  23  [TETRODE_128_0.5ID_0.7OD]  180,30 266.5 top
TET120  24  [TETRODE_128_0.5ID_0.7OD]  180,30 285.2 top
TET121  25  [TETRODE_128_0.5ID_0.7OD]  180,30 294.5 top
TET122  26  [TETRODE_128_0.5ID_0.7OD]  180,30 303.9 top
TET123  27  [TETRODE_128_0.5ID_0.7OD]  180,30 313.2 top
TET124  28  [TETRODE_128_0.5ID_0.7OD]  180,30 322.6 top
TET125  29  [TETRODE_128_0.5ID_0.7OD]  180,30 332 top
TET126  30  [TETRODE_128_0.5ID_0.7OD]  180,30 341.3 top
TET127  31  [TETRODE_128_0.5ID_0.7OD]  180,30 350.7 top
TET128  0  [TETRODE_128_0.5ID_0.7OD]  30,80 350.7 bottom
TET129  1  [TETRODE_128_0.5ID_0.7OD]  30,80 341.3 bottom
TET130  2  [TETRODE_128_0.5ID_0.7OD]  30,80 332 bottom
TET131  3  [TETRODE_128_0.5ID_0.7OD]  30,80 322.6 bottom
TET132  4  [TETRODE_128_0.5ID_0.7OD]  30,80 313.2 bottom
TET133  5  [TETRODE_128_0.5ID_0.7OD]  30,80 303.9 bottom
TET134  6  [TETRODE_128_0.5ID_0.7OD]  30,80 294.5 bottom
TET135  7  [TETRODE_128_0.5ID_0.7OD]  30,80 285.2 bottom
TET136  8  [TETRODE_128_0.5ID_0.7OD]  30,80 266.5 bottom
TET137  9  [TETRODE_128_0.5ID_0.7OD]  30,80 257.2 bottom
TET138  10  [TETRODE_128_0.5ID_0.7OD]  30,80 247.8 bottom
TET139  11  [TETRODE_128_0.5ID_0.7OD]  30,80 238.4 bottom
TET140  12  [TETRODE_128_0.5ID_0.7OD]  30,80 229.1 bottom
TET141  13  [TETRODE_128_0.5ID_0.7OD]  30,80 219.7 bottom
TET142  14  [TETRODE_128_0.5ID_0.7OD]  30,80 210.4 bottom
TET143  15  [TETRODE_128_0.5ID_0.7OD]  30,80 201 bottom
TET144  16  [TETRODE_128_0.5ID_0.7OD]  30,80 201 top
TET145  17  [TETRODE_128_0.5ID_0.7OD]  30,80 210.4 top
TET146  18  [TETRODE_128_0.5ID_0.7OD]  30,80 219.7 top
TET147  19  [TETRODE_128_0.5ID_0.7OD]  30,80 229.1 top
TET148  20  [TETRODE_128_0.5ID_0.7OD]  30,80 238.4 top
TET149  21  [TETRODE_128_0.5ID_0.7OD]  30,80 247.8 top
TET150  22  [TETRODE_128_0.5ID_0.7OD]  30,80 257.2 top
TET151  23  [TETRODE_128_0.5ID_0.7OD]  30,80 266.5 top
TET152  24  [TETRODE_128_0.5ID_0.7OD]  30,80 285.2 top
TET153  25  [TETRODE_128_0.5ID_0.7OD]  30,80 294.5 top
TET154  26  [TETRODE_128_0.5ID_0.7OD]  30,80 303.9 top
TET155  27  [TETRODE_128_0.5ID_0.7OD]  30,80 313.2 top
TET156  28  [TETRODE_128_0.5ID_0.7OD]  30,80 322.6 top
TET157  29  [TETRODE_128_0.5ID_0.7OD]  30,80 332 top
TET158  30  [TETRODE_128_0.5ID_0.7OD]  30,80 341.3 top
TET159  31  [TETRODE_128_0.5ID_0.7OD]  30,80 350.7 top
TET160  0  [TETRODE_128_0.5ID_0.7OD]  80,80 350.7 bottom
TET161  1  [TETRODE_128_0.5ID_0.7OD]  80,80 341.3 bottom
TET162  2  [TETRODE_128_0.5ID_0.7OD]  80,80 332 bottom
TET163  3  [TETRODE_128_0.5ID_0.7OD]  80,80 322.6 bottom
TET164  4  [TETRODE_128_0.5ID_0.7OD]  80,80 313.2 bottom
TET165  5  [TETRODE_128_0.5ID_0.7OD]  80,80 303.9 bottom
TET166  6  [TETRODE_128_0.5ID_0.7OD]  80,80 294.5 bottom
TET167  7  [TETRODE_128_0.5ID_0.7OD]  80,80 285.2 bottom
TET168  8  [TETRODE_128_0.5ID_0.7OD]  80,80 266.5 bottom
TET169  9  [TETRODE_128_0.5ID_0.7OD]  80,80 257.2 bottom
TET170  10  [TETRODE_128_0.5ID_0.7OD]  80,80 247.8 bottom
TET171  11  [TETRODE_128_0.5ID_0.7OD]  80,80 238.4 bottom
TET172  12  [TETRODE_128_0.5ID_0.7OD]  80,80 229.1 bottom
TET173  13  [TETRODE_128_0.5ID_0.7OD]  80,80 219.7 bottom
TET174  14  [TETRODE_128_0.5ID_0.7OD]  80,80 210.4 bottom
TET175  15  [TETRODE_128_0.5ID_0.7OD]  80,80 201 bottom
TET176  16  [TETRODE_128_0.5ID_0.7OD]  80,80 201 top
TET177  17  [TETRODE_128_0.5ID_0.7OD]  80,80 210.4 top
TET178  18  [TETRODE_128_0.5ID_0.7OD]  80,80 219.7 top
TET179  19  [TETRODE_128_0.5ID_0.7OD]  80,80 229.1 top
TET180  20  [TETRODE_128_0.5ID_0.7OD]  80,80 238.4 top
TET181  21  [TETRODE_128_0.5ID_0.7OD]  80,80 247.8 top
TET182  22  [TETRODE_128_0.5ID_0.7OD]  80,80 257.2 top
TET183  23  [TETRODE_128_0.5ID_0.7OD]  80,80 266.5 top
TET184  24  [TETRODE_128_0.5ID_0.7OD]  80,80 285.2 top
TET185  25  [TETRODE_128_0.5ID_0.7OD]  80,80 294.5 top
TET186  26  [TETRODE_128_0.5ID_0.7OD]  80,80 303.9 top
TET187  27  [TETRODE_128_0.5ID_0.7OD]  80,80 313.2 top
TET188  28  [TETRODE_128_0.5ID_0.7OD]  80,80 322.6 top
TET189  29  [TETRODE_128_0.5ID_0.7OD]  80,80 332 top
TET190  30  [TETRODE_128_0.5ID_0.7OD]  80,80 341.3 top
TET191  31  [TETRODE_128_0.5ID_0.7OD]  80,80 350.7 top
TET192  0  [TETRODE_128_0.5ID_0.7OD]  130,80 350.7 bottom
TET193  1  [TETRODE_128_0.5ID_0.7OD]  130,80 341.3 bottom
TET194  2  [TETRODE_128_0.5ID_0.7OD]  130,80 332 bottom
TET195  3  [TETRODE_128_0.5ID_0.7OD]  130,80 322.6 bottom
TET196  4  [TETRODE_128_0.5ID_0.7OD]  130,80 313.2 bottom
TET197  5  [TETRODE_128_0.5ID_0.7OD]  130,80 303.9 bottom
TET198  6  [TETRODE_128_0.5ID_0.7OD]  130,80 294.5 bottom
TET199  7  [TETRODE_128_0.5ID_0.7OD]  130,80 285.2 bottom
TET200  8  [TETRODE_128_0.5ID_0.7OD]  130,80 266.5 bottom
TET201  9  [TETRODE_128_0.5ID_0.7OD]  130,80 257.2 bottom
TET202  10  [TETRODE_128_0.5ID_0.7OD]  130,80 247.8 bottom
TET203  11  [TETRODE_128_0.5ID_0.7OD]  130,80 238.4 bottom
TET204  12  [TETRODE_128_0.5ID_0.7OD]  130,80 229.1 bottom
TET205  13  [TETRODE_128_0.5ID_0.7OD]  130,80 219.7 bottom
TET206  14  [TETRODE_128_0.5ID_0.7OD]  130,80 210.4 bottom
TET207  15  [TETRODE_128_0.5ID_0.7OD]  130,80 201 bottom
TET208  16  [TETRODE_128_0.5ID_0.7OD]  130,80 201 top
TET209  17  [TETRODE_128_0.5ID_0.7OD]  130,80 210.4 top
TET210  18  [TETRODE_128_0.5ID_0.7OD]  130,80 219.7 top
TET211  19  [TETRODE_128_0.5ID_0.7OD]  130,80 229.1 top
TET212  20  [TETRODE_128_0.5ID_0.7OD]  130,80 238.4 top
TET213  21  [TETRODE_128_0.5ID_0.7OD]  130,80 247.8 top
TET214  22  [TETRODE_128_0.5ID_0.7OD]  130,80 257.2 top
TET215  23  [TETRODE_128_0.5ID_0.7OD]  130,80 266.5 top
TET216  24  [TETRODE_128_0.5ID_0.7OD]  130,80 285.2 top
TET217  25  [TETRODE_128_0.5ID_0.7OD]  130,80 294.5 top
TET218  26  [TETRODE_128_0.5ID_0.7OD]  130,80 303.9 top
TET219  27  [TETRODE_128_0.5ID_0.7OD]  130,80 313.2 top
TET220  28  [TETRODE_128_0.5ID_0.7OD]  130,80 322.6 top
TET221  29  [TETRODE_128_0.5ID_0.7OD]  130,80 332 top
TET222  30  [TETRODE_128_0.5ID_0.7OD]  130,80 341.3 top
TET223  31  [TETRODE_128_0.5ID_0.7OD]  130,80 350.7 top
TET224  0  [TETRODE_128_0.5ID_0.7OD]  180,80 350.7 bottom
TET225  1  [TETRODE_128_0.5ID_0.7OD]  180,80 341.3 bottom
TET226  2  [TETRODE_128_0.5ID_0.7OD]  180,80 332 bottom
TET227  3  [TETRODE_128_0.5ID_0.7OD]  180,80 322.6 bottom
TET228  4  [TETRODE_128_0.5ID_0.7OD]  180,80 313.2 bottom
TET229  5  [TETRODE_128_0.5ID_0.7OD]  180,80 303.9 bottom
TET230  6  [TETRODE_128_0.5ID_0.7OD]  180,80 294.5 bottom
TET231  7  [TETRODE_128_0.5ID_0.7OD]  180,80 285.2 bottom
TET232  8  [TETRODE_128_0.5ID_0.7OD]  180,80 266.5 bottom
TET233  9  [TETRODE_128_0.5ID_0.7OD]  180,80 257.2 bottom
TET234  10  [TETRODE_128_0.5ID_0.7OD]  180,80 247.8 bottom
TET235  11  [TETRODE_128_0.5ID_0.7OD]  180,80 238.4 bottom
TET236  12  [TETRODE_128_0.5ID_0.7OD]  180,80 229.1 bottom
TET237  13  [TETRODE_128_0.5ID_0.7OD]  180,80 219.7 bottom
TET238  14  [TETRODE_128_0.5ID_0.7OD]  180,80 210.4 bottom
TET239  15  [TETRODE_128_0.5ID_0.7OD]  180,80 201 bottom
TET240  16  [TETRODE_128_0.5ID_0.7OD]  180,80 201 top
TET241  17  [TETRODE_128_0.5ID_0.7OD]  180,80 210.4 top
TET242  18  [TETRODE_128_0.5ID_0.7OD]  180,80 219.7 top
TET243  19  [TETRODE_128_0.5ID_0.7OD]  180,80 229.1 top
TET244  20  [TETRODE_128_0.5ID_0.7OD]  180,80 238.4 top
TET245  21  [TETRODE_128_0.5ID_0.7OD]  180,80 247.8 top
TET246  22  [TETRODE_128_0.5ID_0.7OD]  180,80 257.2 top
TET247  23  [TETRODE_128_0.5ID_0.7OD]  180,80 266.5 top
TET248  24  [TETRODE_128_0.5ID_0.7OD]  180,80 285.2 top
TET249  25  [TETRODE_128_0.5ID_0.7OD]  180,80 294.5 top
TET250  26  [TETRODE_128_0.5ID_0.7OD]  180,80 303.9 top
TET251  27  [TETRODE_128_0.5ID_0.7OD]  180,80 313.2 top
TET252  28  [TETRODE_128_0.5ID_0.7OD]  180,80 322.6 top
TET253  29  [TETRODE_128_0.5ID_0.7OD]  180,80 332 top
TET254  30  [TETRODE_128_0.5ID_0.7OD]  180,80 341.3 top
TET255  31  [TETRODE_128_0.5ID_0.7OD]  180,80 350.7 top
TET256  0  [TETRODE_128_0.5ID_0.7OD]  30,130 350.7 bottom
TET257  1  [TETRODE_128_0.5ID_0.7OD]  30,130 341.3 bottom
TET258  2  [TETRODE_128_0.5ID_0.7OD]  30,130 332 bottom
TET259  3  [TETRODE_128_0.5ID_0.7OD]  30,130 322.6 bottom
TET260  4  [TETRODE_128_0.5ID_0.7OD]  30,130 313.2 bottom
TET261  5  [TETRODE_128_0.5ID_0.7OD]  30,130 303.9 bottom
TET262  6  [TETRODE_128_0.5ID_0.7OD]  30,130 294.5 bottom
TET263  7  [TETRODE_128_0.5ID_0.7OD]  30,130 285.2 bottom
TET264  8  [TETRODE_128_0.5ID_0.7OD]  30,130 266.5 bottom
TET265  9  [TETRODE_128_0.5ID_0.7OD]  30,130 257.2 bottom
TET266  10  [TETRODE_128_0.5ID_0.7OD]  30,130 247.8 bottom
TET267  11  [TETRODE_128_0.5ID_0.7OD]  30,130 238.4 bottom
TET268  12  [TETRODE_128_0.5ID_0.7OD]  30,130 229.1 bottom
TET269  13  [TETRODE_128_0.5ID_0.7OD]  30,130 219.7 bottom
TET270  14  [TETRODE_128_0.5ID_0.7OD]  30,130 210.4 bottom
TET271  15  [TETRODE_128_0.5ID_0.7OD]  30,130 201 bottom
TET272  16  [TETRODE_128_0.5ID_0.7OD]  30,130 201 top
TET273  17  [TETRODE_128_0.5ID_0.7OD]  30,130 210.4 top
TET274  18  [TETRODE_128_0.5ID_0.7OD]  30,130 219.7 top
TET275  19  [TETRODE_128_0.5ID_0.7OD]  30,130 229.1 top
TET276  20  [TETRODE_128_0.5ID_0.7OD]  30,130 238.4 top
TET277  21  [TETRODE_128_0.5ID_0.7OD]  30,130 247.8 top
TET278  22  [TETRODE_128_0.5ID_0.7OD]  30,130 257.2 top
TET279  23  [TETRODE_128_0.5ID_0.7OD]  30,130 266.5 top
TET280  24  [TETRODE_128_0.5ID_0.7OD]  30,130 285.2 top
TET281  25  [TETRODE_128_0.5ID_0.7OD]  30,130 294.5 top
TET282  26  [TETRODE_128_0.5ID_0.7OD]  30,130 303.9 top
TET283  27  [TETRODE_128_0.5ID_0.7OD]  30,130 313.2 top
TET284  28  [TETRODE_128_0.5ID_0.7OD]  30,130 322.6 top
TET285  29  [TETRODE_128_0.5ID_0.7OD]  30,130 332 top
TET286  30  [TETRODE_128_0.5ID_0.7OD]  30,130 341.3 top
TET287  31  [TETRODE_128_0.5ID_0.7OD]  30,130 350.7 top
TET288  0  [TETRODE_128_0.5ID_0.7OD]  80,130 350.7 bottom
TET289  1  [TETRODE_128_0.5ID_0.7OD]  80,130 341.3 bottom
TET290  2  [TETRODE_128_0.5ID_0.7OD]  80,130 332 bottom
TET291  3  [TETRODE_128_0.5ID_0.7OD]  80,130 322.6 bottom
TET292  4  [TETRODE_128_0.5ID_0.7OD]  80,130 313.2 bottom
TET293  5  [TETRODE_128_0.5ID_0.7OD]  80,130 303.9 bottom
TET294  6  [TETRODE_128_0.5ID_0.7OD]  80,130 294.5 bottom
TET295  7  [TETRODE_128_0.5ID_0.7OD]  80,130 285.2 bottom
TET296  8  [TETRODE_128_0.5ID_0.7OD]  80,130 266.5 bottom
TET297  9  [TETRODE_128_0.5ID_0.7OD]  80,130 257.2 bottom
TET298  10  [TETRODE_128_0.5ID_0.7OD]  80,130 247.8 bottom
TET299  11  [TETRODE_128_0.5ID_0.7OD]  80,130 238.4 bottom
TET300  12  [TETRODE_128_0.5ID_0.7OD]  80,130 229.1 bottom
TET301  13  [TETRODE_128_0.5ID_0.7OD]  80,130 219.7 bottom
TET302  14  [TETRODE_128_0.5ID_0.7OD]  80,130 210.4 bottom
TET303  15  [TETRODE_128_0.5ID_0.7OD]  80,130 201 bottom
TET304  16  [TETRODE_128_0.5ID_0.7OD]  80,130 201 top
TET305  17  [TETRODE_128_0.5ID_0.7OD]  80,130 210.4 top
TET306  18  [TETRODE_128_0.5ID_0.7OD]  80,130 219.7 top
TET307  19  [TETRODE_128_0.5ID_0.7OD]  80,130 229.1 top
TET308  20  [TETRODE_128_0.5ID_0.7OD]  80,130 238.4 top
TET309  21  [TETRODE_128_0.5ID_0.7OD]  80,130 247.8 top
TET310  22  [TETRODE_128_0.5ID_0.7OD]  80,130 257.2 top
TET311  23  [TETRODE_128_0.5ID_0.7OD]  80,130 266.5 top
TET312  24  [TETRODE_128_0.5ID_0.7OD]  80,130 285.2 top
TET313  25  [TETRODE_128_0.5ID_0.7OD]  80,130 294.5 top
TET314  26  [TETRODE_128_0.5ID_0.7OD]  80,130 303.9 top
TET315  27  [TETRODE_128_0.5ID_0.7OD]  80,130 313.2 top
TET316  28  [TETRODE_128_0.5ID_0.7OD]  80,130 322.6 top
TET317  29  [TETRODE_128_0.5ID_0.7OD]  80,130 332 top
TET318  30  [TETRODE_128_0.5ID_0.7OD]  80,130 341.3 top
TET319  31  [TETRODE_128_0.5ID_0.7OD]  80,130 350.7 top
TET320  0  [TETRODE_128_0.5ID_0.7OD]  130,130 350.7 bottom
TET321  1  [TETRODE_128_0.5ID_0.7OD]  130,130 341.3 bottom
TET322  2  [TETRODE_128_0.5ID_0.7OD]  130,130 332 bottom
TET323  3  [TETRODE_128_0.5ID_0.7OD]  130,130 322.6 bottom
TET324  4  [TETRODE_128_0.5ID_0.7OD]  130,130 313.2 bottom
TET325  5  [TETRODE_128_0.5ID_0.7OD]  130,130 303.9 bottom
TET326  6  [TETRODE_128_0.5ID_0.7OD]  130,130 294.5 bottom
TET327  7  [TETRODE_128_0.5ID_0.7OD]  130,130 285.2 bottom
TET328  8  [TETRODE_128_0.5ID_0.7OD]  130,130 266.5 bottom
TET329  9  [TETRODE_128_0.5ID_0.7OD]  130,130 257.2 bottom
TET330  10  [TETRODE_128_0.5ID_0.7OD]  130,130 247.8 bottom
TET331  11  [TETRODE_128_0.5ID_0.7OD]  130,130 238.4 bottom
TET332  12  [TETRODE_128_0.5ID_0.7OD]  130,130 229.1 bottom
TET333  13  [TETRODE_128_0.5ID_0.7OD]  130,130 219.7 bottom
TET334  14  [TETRODE_128_0.5ID_0.7OD]  130,130 210.4 bottom
TET335  15  [TETRODE_128_0.5ID_0.7OD]  130,130 201 bottom
TET336  16  [TETRODE_128_0.5ID_0.7OD]  130,130 201 top
TET337  17  [TETRODE_128_0.5ID_0.7OD]  130,130 210.4 top
TET338  18  [TETRODE_128_0.5ID_0.7OD]  130,130 219.7 top
TET339  19  [TETRODE_128_0.5ID_0.7OD]  130,130 229.1 top
TET340  20  [TETRODE_128_0.5ID_0.7OD]  130,130 238.4 top
TET341  21  [TETRODE_128_0.5ID_0.7OD]  130,130 247.8 top
TET342  22  [TETRODE_128_0.5ID_0.7OD]  130,130 257.2 top
TET343  23  [TETRODE_128_0.5ID_0.7OD]  130,130 266.5 top
TET344  24  [TETRODE_128_0.5ID_0.7OD]  130,130 285.2 top
TET345  25  [TETRODE_128_0.5ID_0.7OD]  130,130 294.5 top
TET346  26  [TETRODE_128_0.5ID_0.7OD]  130,130 303.9 top
TET347  27  [TETRODE_128_0.5ID_0.7OD]  130,130 313.2 top
TET348  28  [TETRODE_128_0.5ID_0.7OD]  130,130 322.6 top
TET349  29  [TETRODE_128_0.5ID_0.7OD]  130,130 332 top
TET350  30  [TETRODE_128_0.5ID_0.7OD]  130,130 341.3 top
TET351  31  [TETRODE_128_0.5ID_0.7OD]  130,130 350.7 top
TET352  0  [TETRODE_128_0.5ID_0.7OD]  180,130 350.7 bottom
TET353  1  [TETRODE_128_0.5ID_0.7OD]  180,130 341.3 bottom
TET354  2  [TETRODE_128_0.5ID_0.7OD]  180,130 332 bottom
TET355  3  [TETRODE_128_0.5ID_0.7OD]  180,130 322.6 bottom
TET356  4  [TETRODE_128_0.5ID_0.7OD]  180,130 313.2 bottom
TET357  5  [TETRODE_128_0.5ID_0.7OD]  180,130 303.9 bottom
TET358  6  [TETRODE_128_0.5ID_0.7OD]  180,130 294.5 bottom
TET359  7  [TETRODE_128_0.5ID_0.7OD]  180,130 285.2 bottom
TET360  8  [TETRODE_128_0.5ID_0.7OD]  180,130 266.5 bottom
TET361  9  [TETRODE_128_0.5ID_0.7OD]  180,130 257.2 bottom
TET362  10  [TETRODE_128_0.5ID_0.7OD]  180,130 247.8 bottom
TET363  11  [TETRODE_128_0.5ID_0.7OD]  180,130 238.4 bottom
TET364  12  [TETRODE_128_0.5ID_0.7OD]  180,130 229.1 bottom
TET365  13  [TETRODE_128_0.5ID_0.7OD]  180,130 219.7 bottom
TET366  14  [TETRODE_128_0.5ID_0.7OD]  180,130 210.4 bottom
TET367  15  [TETRODE_128_0.5ID_0.7OD]  180,130 201 bottom
TET368  16  [TETRODE_128_0.5ID_0.7OD]  180,130 201 top
TET369  17  [TETRODE_128_0.5ID_0.7OD]  180,130 210.4 top
TET370  18  [TETRODE_128_0.5ID_0.7OD]  180,130 219.7 top
TET371  19  [TETRODE_128_0.5ID_0.7OD]  180,130 229.1 top
TET372  20  [TETRODE_128_0.5ID_0.7OD]  180,130 238.4 top
TET373  21  [TETRODE_128_0.5ID_0.7OD]  180,130 247.8 top
TET374  22  [TETRODE_128_0.5ID_0.7OD]  180,130 257.2 top
TET375  23  [TETRODE_128_0.5ID_0.7OD]  180,130 266.5 top
TET376  24  [TETRODE_128_0.5ID_0.7OD]  180,130 285.2 top
TET377  25  [TETRODE_128_0.5ID_0.7OD]  180,130 294.5 top
TET378  26  [TETRODE_128_0.5ID_0.7OD]  180,130 303.9 top
TET379  27  [TETRODE_128_0.5ID_0.7OD]  180,130 313.2 top
TET380  28  [TETRODE_128_0.5ID_0.7OD]  180,130 322.6 top
TET381  29  [TETRODE_128_0.5ID_0.7OD]  180,130 332 top
TET382  30  [TETRODE_128_0.5ID_0.7OD]  180,130 341.3 top
TET383  31  [TETRODE_128_0.5ID_0.7OD]  180,130 350.7 top
U$1  [EIB_MOUNT_A]  30,30 0 top
U$2  [EIB_MOUNT_A]  80,30 0 top
U$3  [EIB_MOUNT_A]  130,30 0 top
U$4  [EIB_MOUNT_A]  180,30 0 top
U$5  [EIB_MOUNT_A]  30,80 0 top
U$6  [EIB_MOUNT_A]  80,80 0 top
U$7  [EIB_MOUNT_A]  130,80 0 top
U$8  [EIB_MOUNT_A]  180,80 0 top
U$9  [EIB_MOUNT_A]  30,130 0 top
U$10  [EIB_MOUNT_A]  80,130 0 top
U$11  [EIB_MOUNT_A]  130,130 0 top
U$12  [EIB_MOUNT_A]  180,130 0 top

## Library data of the parts
A A1-A11 AN_A AN_A1-AN_A11 AN_B AN_B1-AN_B11 B B1-B11 CAT0_A CAT0_A1-CAT0_A11 CAT0_B CAT0_B1-CAT0_B11 CAT1_A CAT1_A1-CAT1_A11 CAT1_B CAT1_B1-CAT1_B11 ESTIM_A ESTIM_A1-ESTIM_A11 ESTIM_B ESTIM_B1-ESTIM_B11 GND0 GND1-GND47 REF_A0 REF_A1-REF_A11 REF_B0 REF_B1-REF_B11 SHLD_A SHLD_A1-SHLD_A11 SHLD_B SHLD_B1-SHLD_B11 TET0 TET1-TET383 U$1-U$12 = jonnew